# Altium PCB Master-Slave.PcbDoc (part 1 of 2)
Units mil, origin at the board's own origin, x right, y up, seen from the top; angles counter-clockwise.
Board outline 5500 x 5500 mil, 4 copper layers (Top Layer, Ground, Power, Bottom Layer); 264 components, 141 nets, 902 pads, 458 vias.
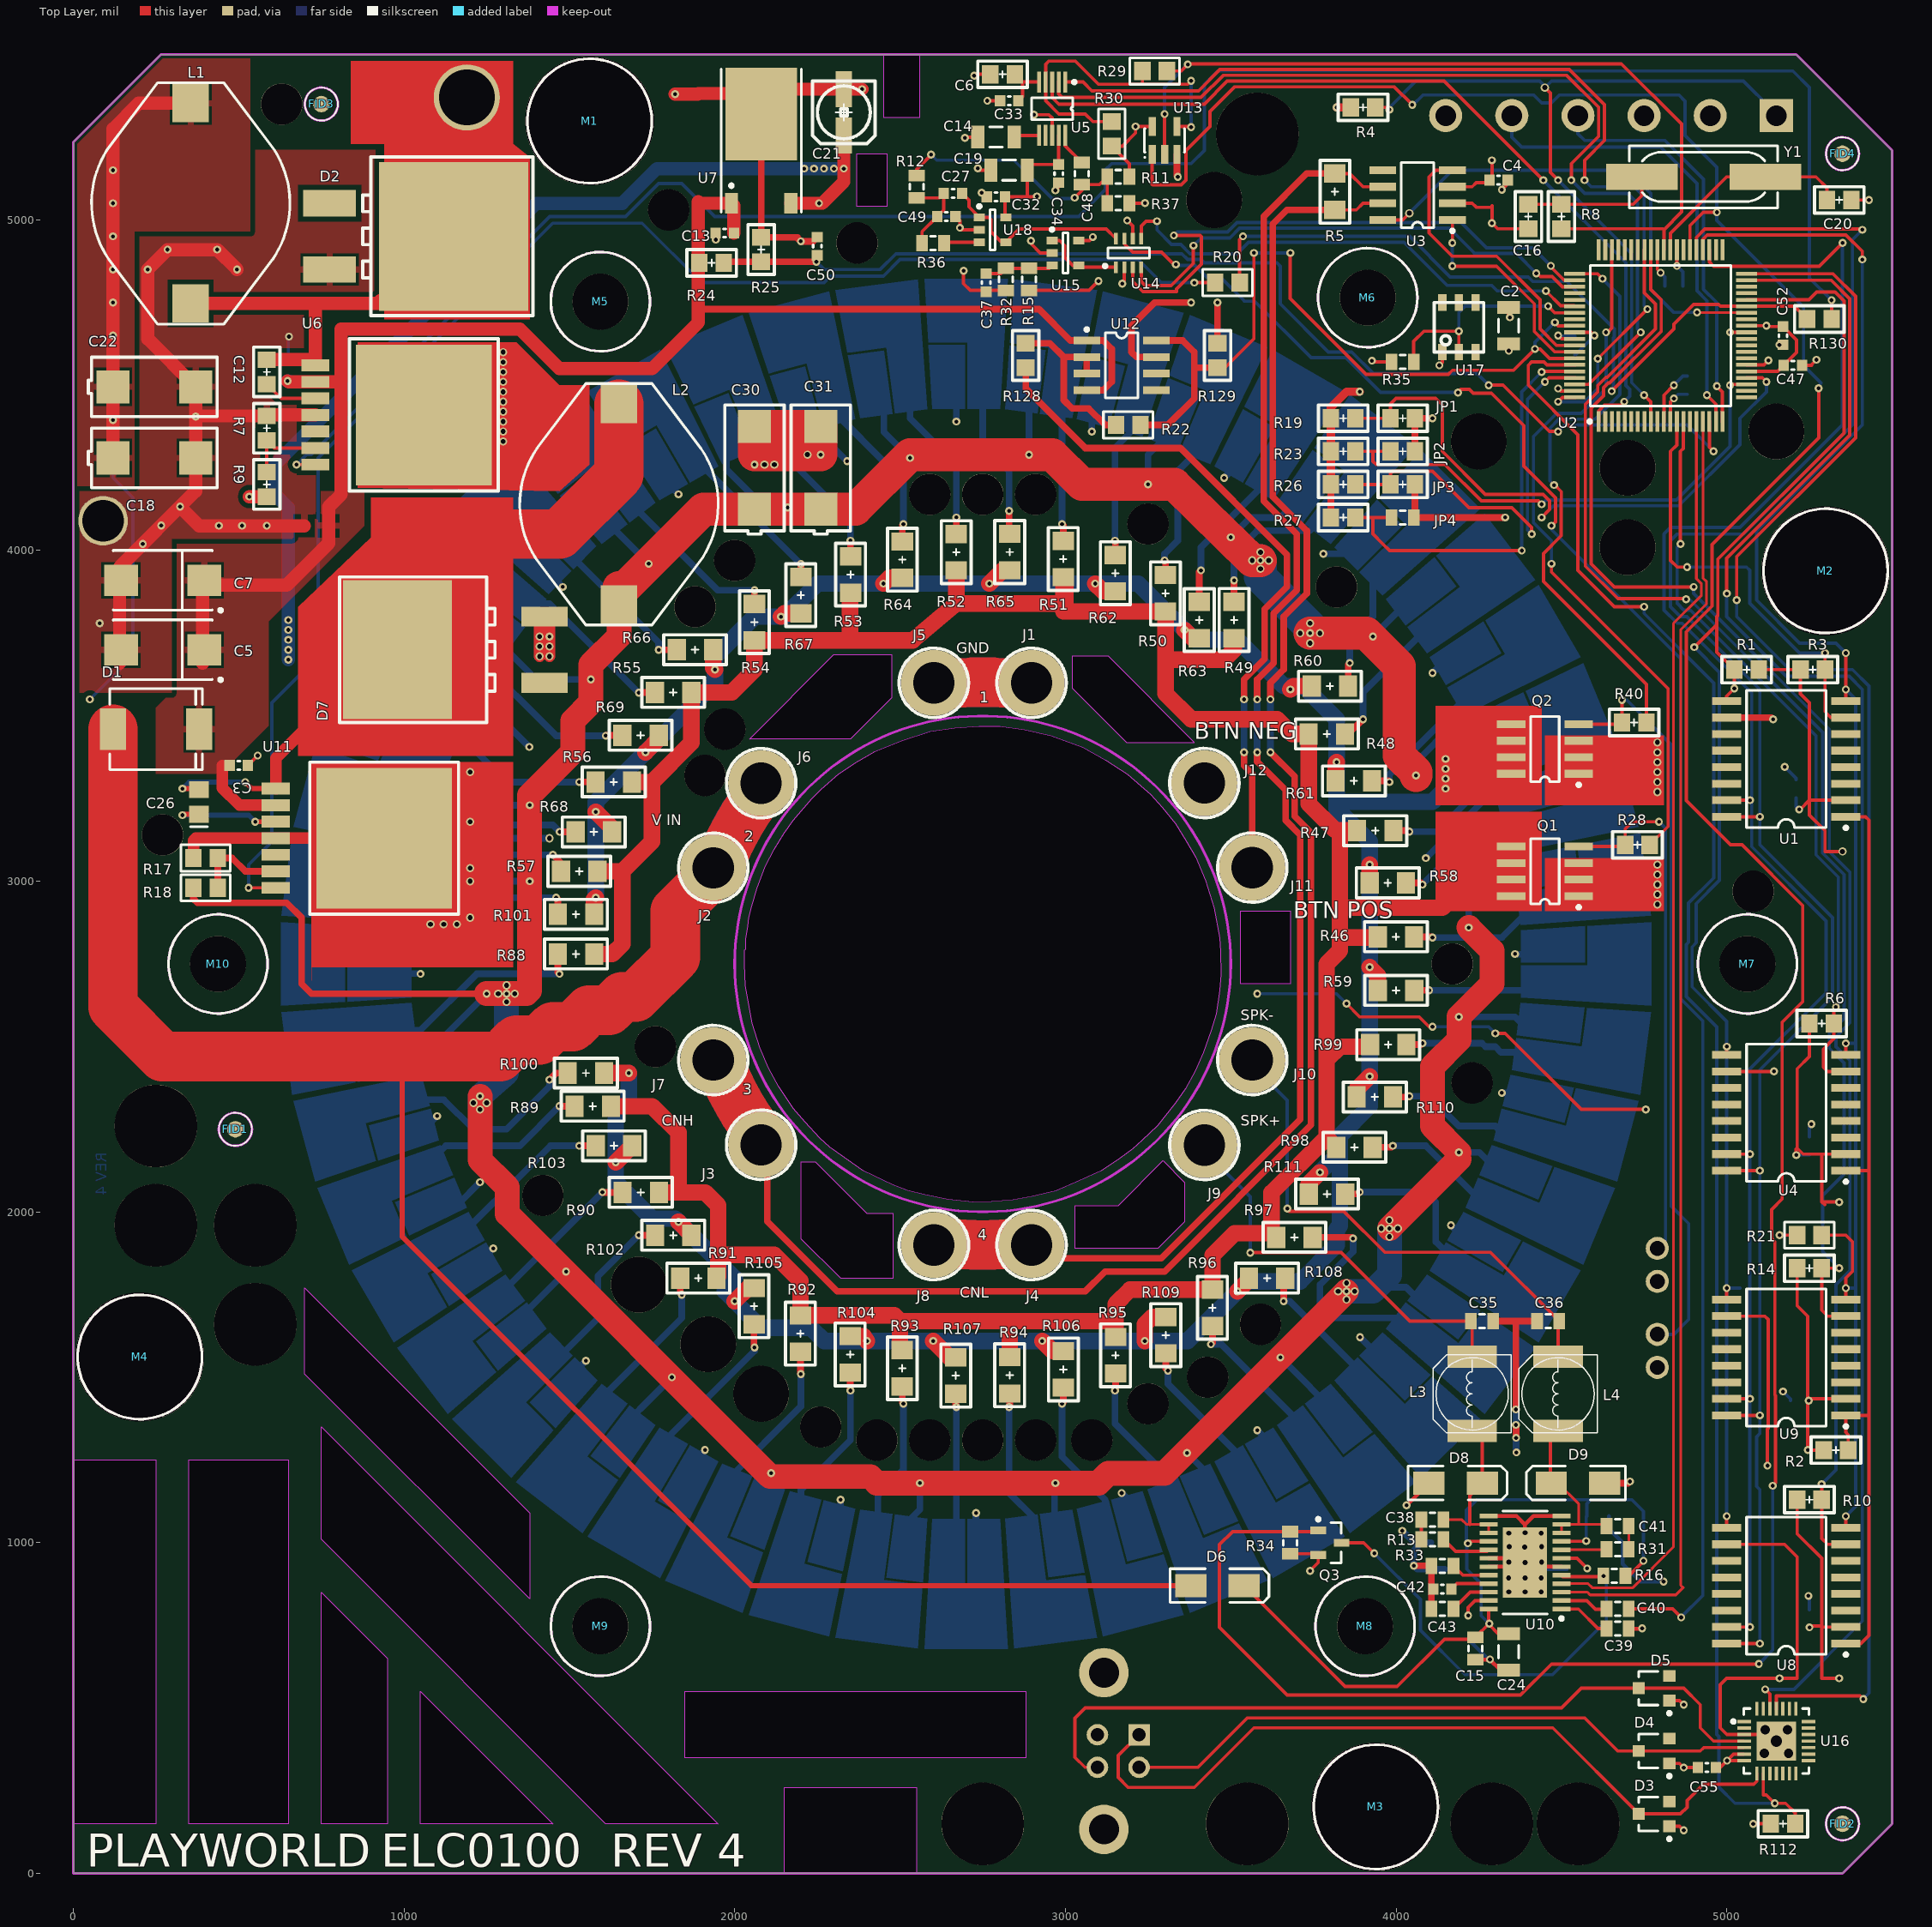
[diagram p0: Top Layer view]
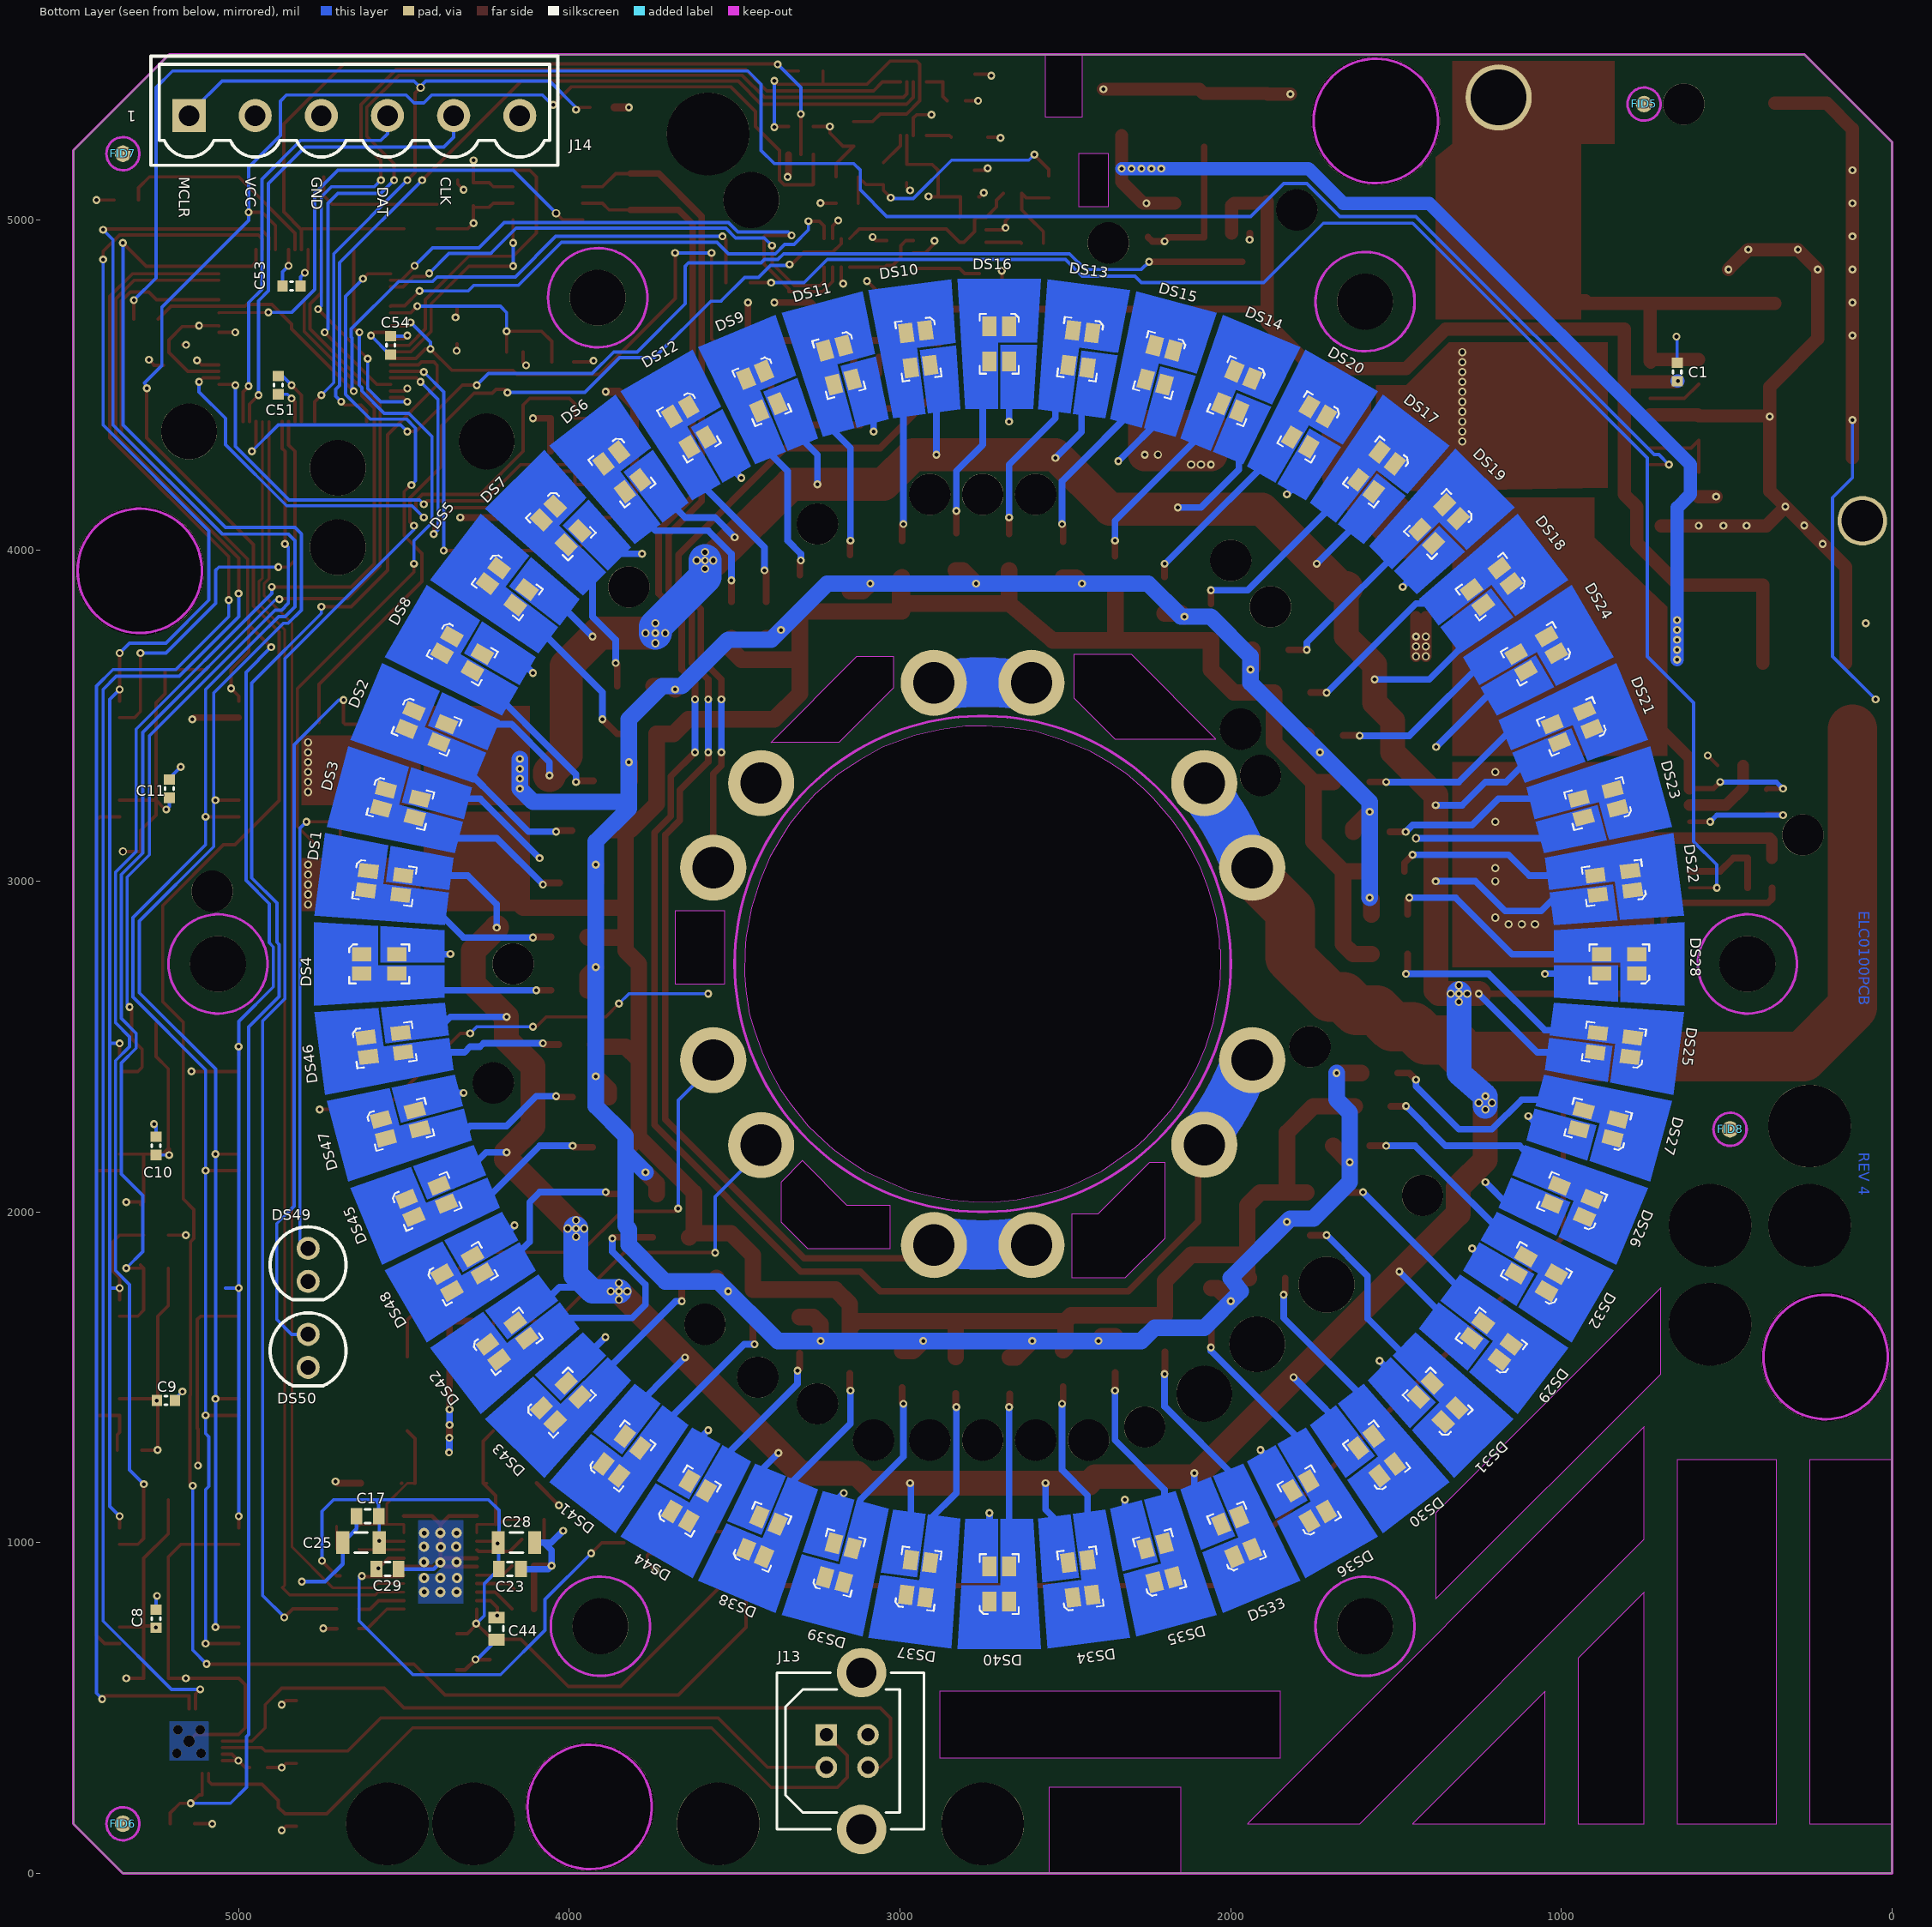
[diagram p1: Bottom Layer view, seen from below]
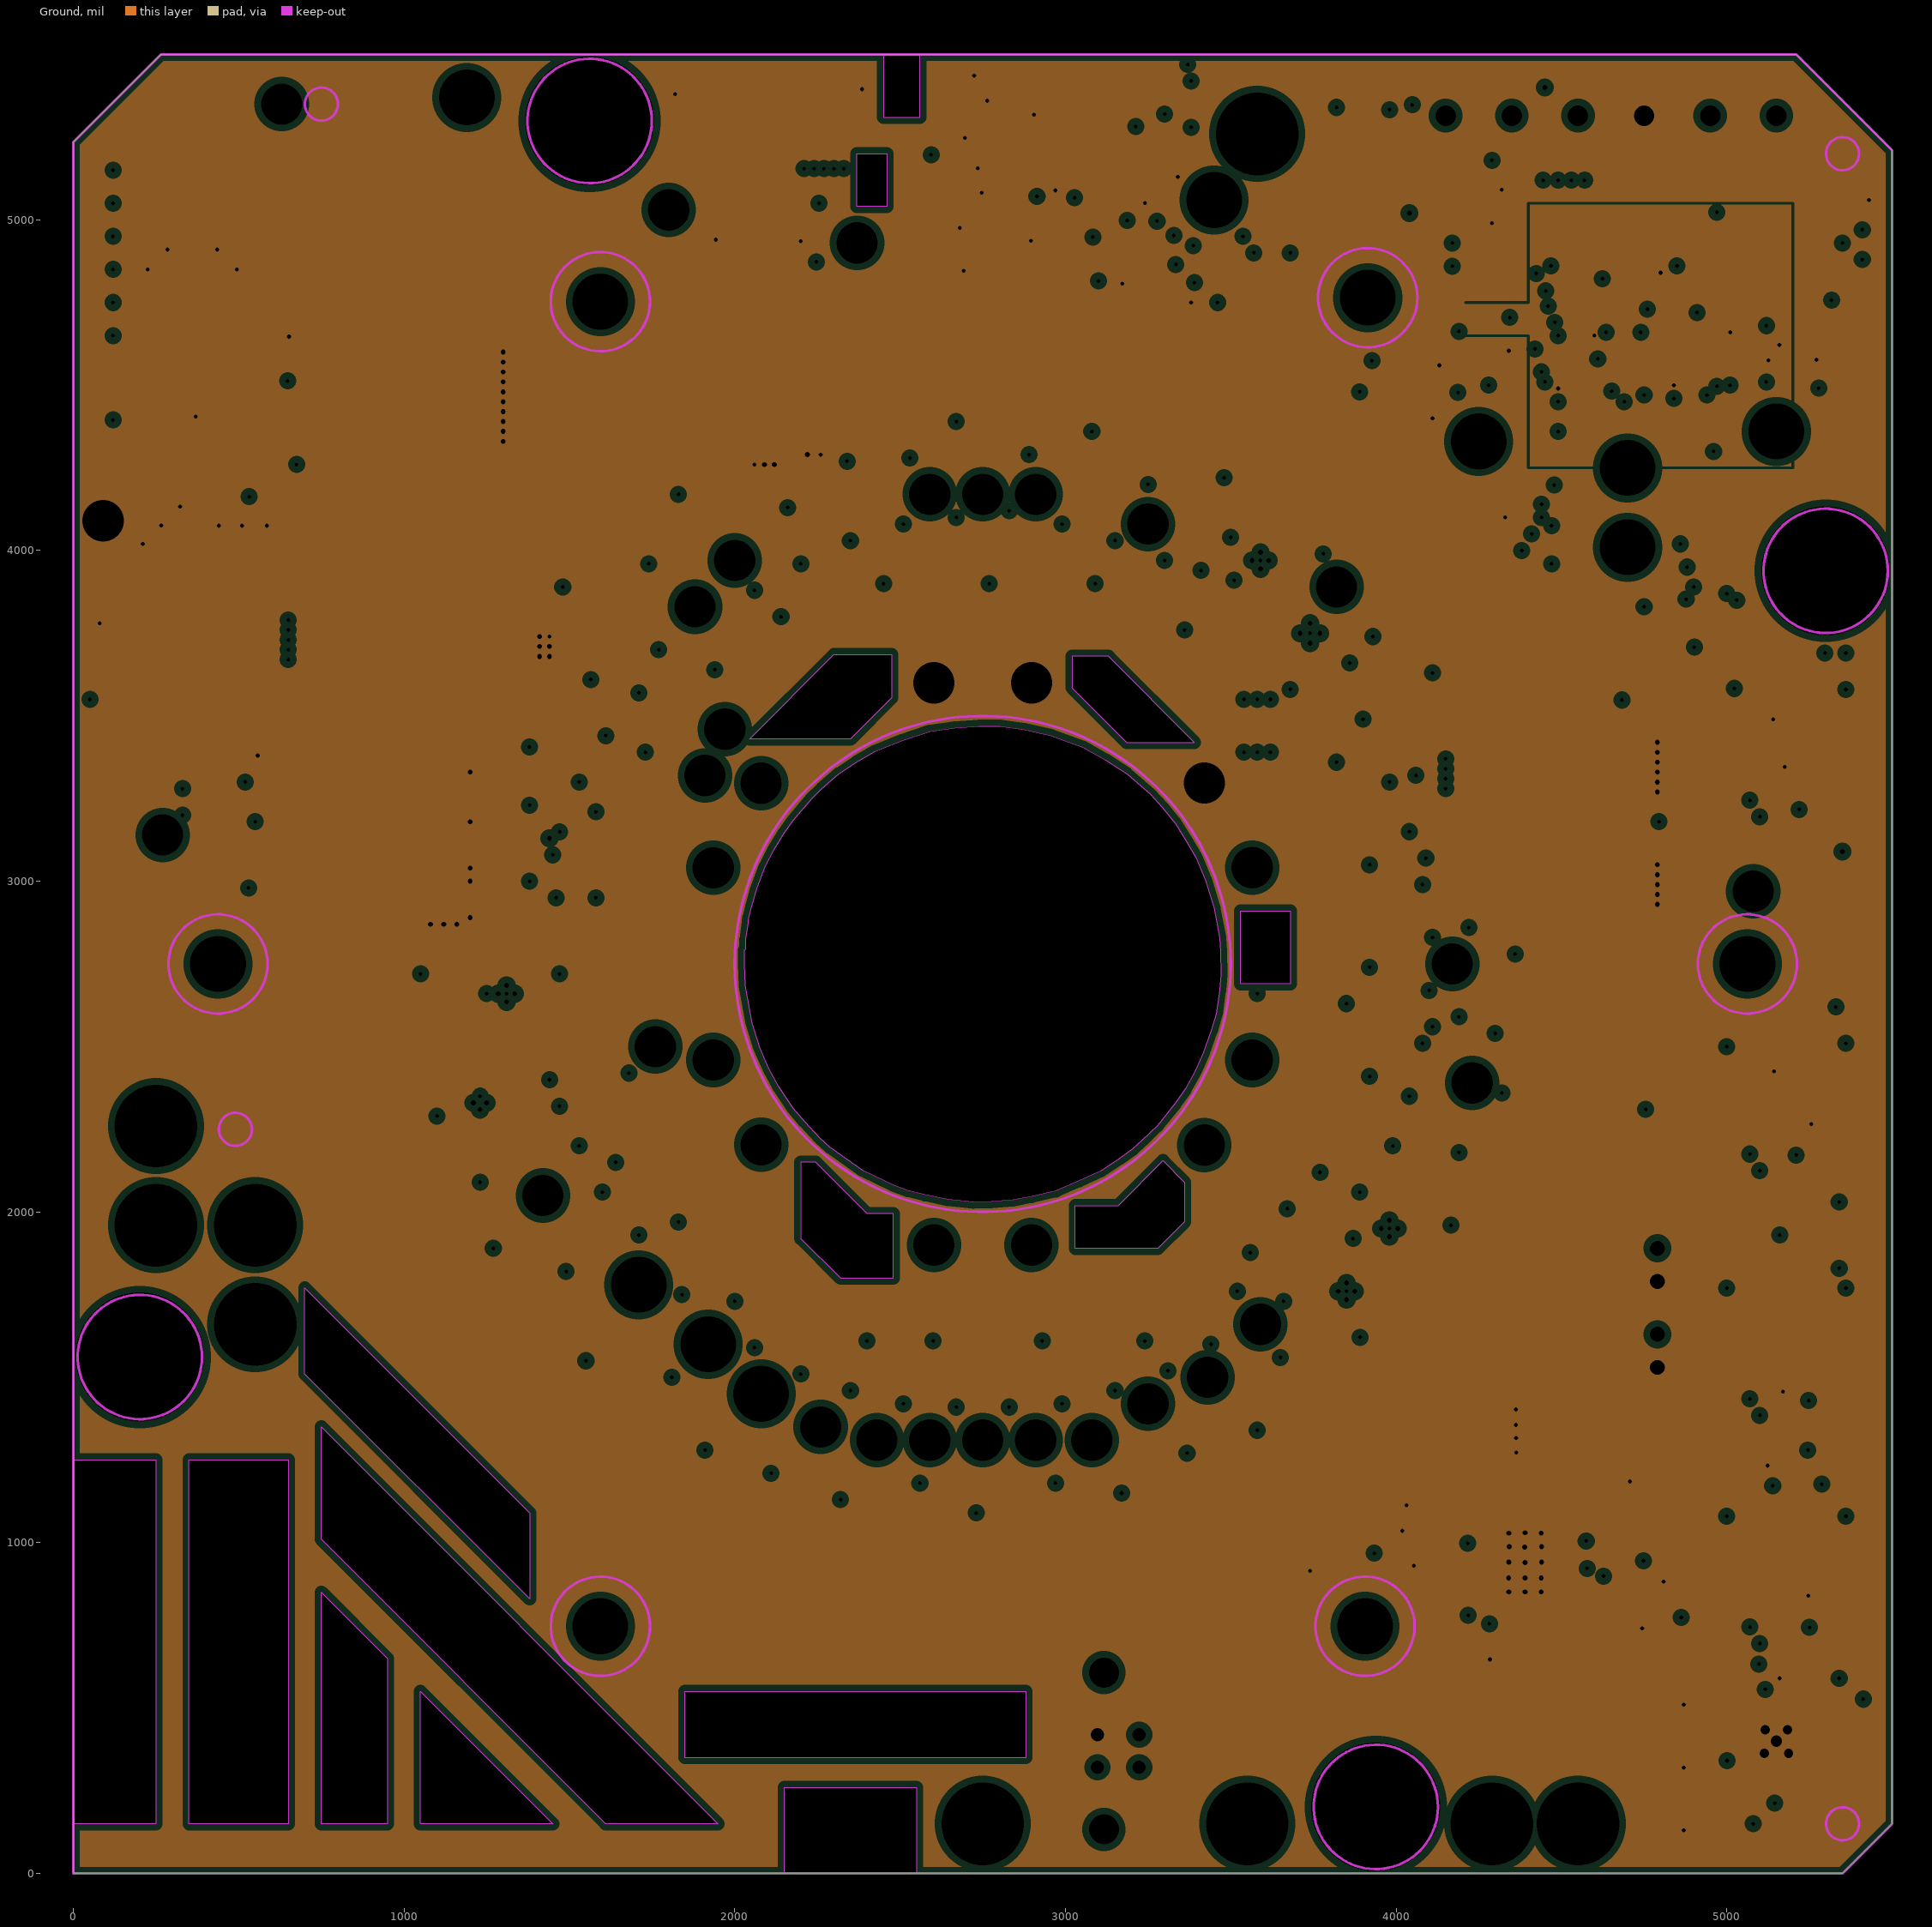
[diagram p2: Ground, clearances drawn from the general rule]
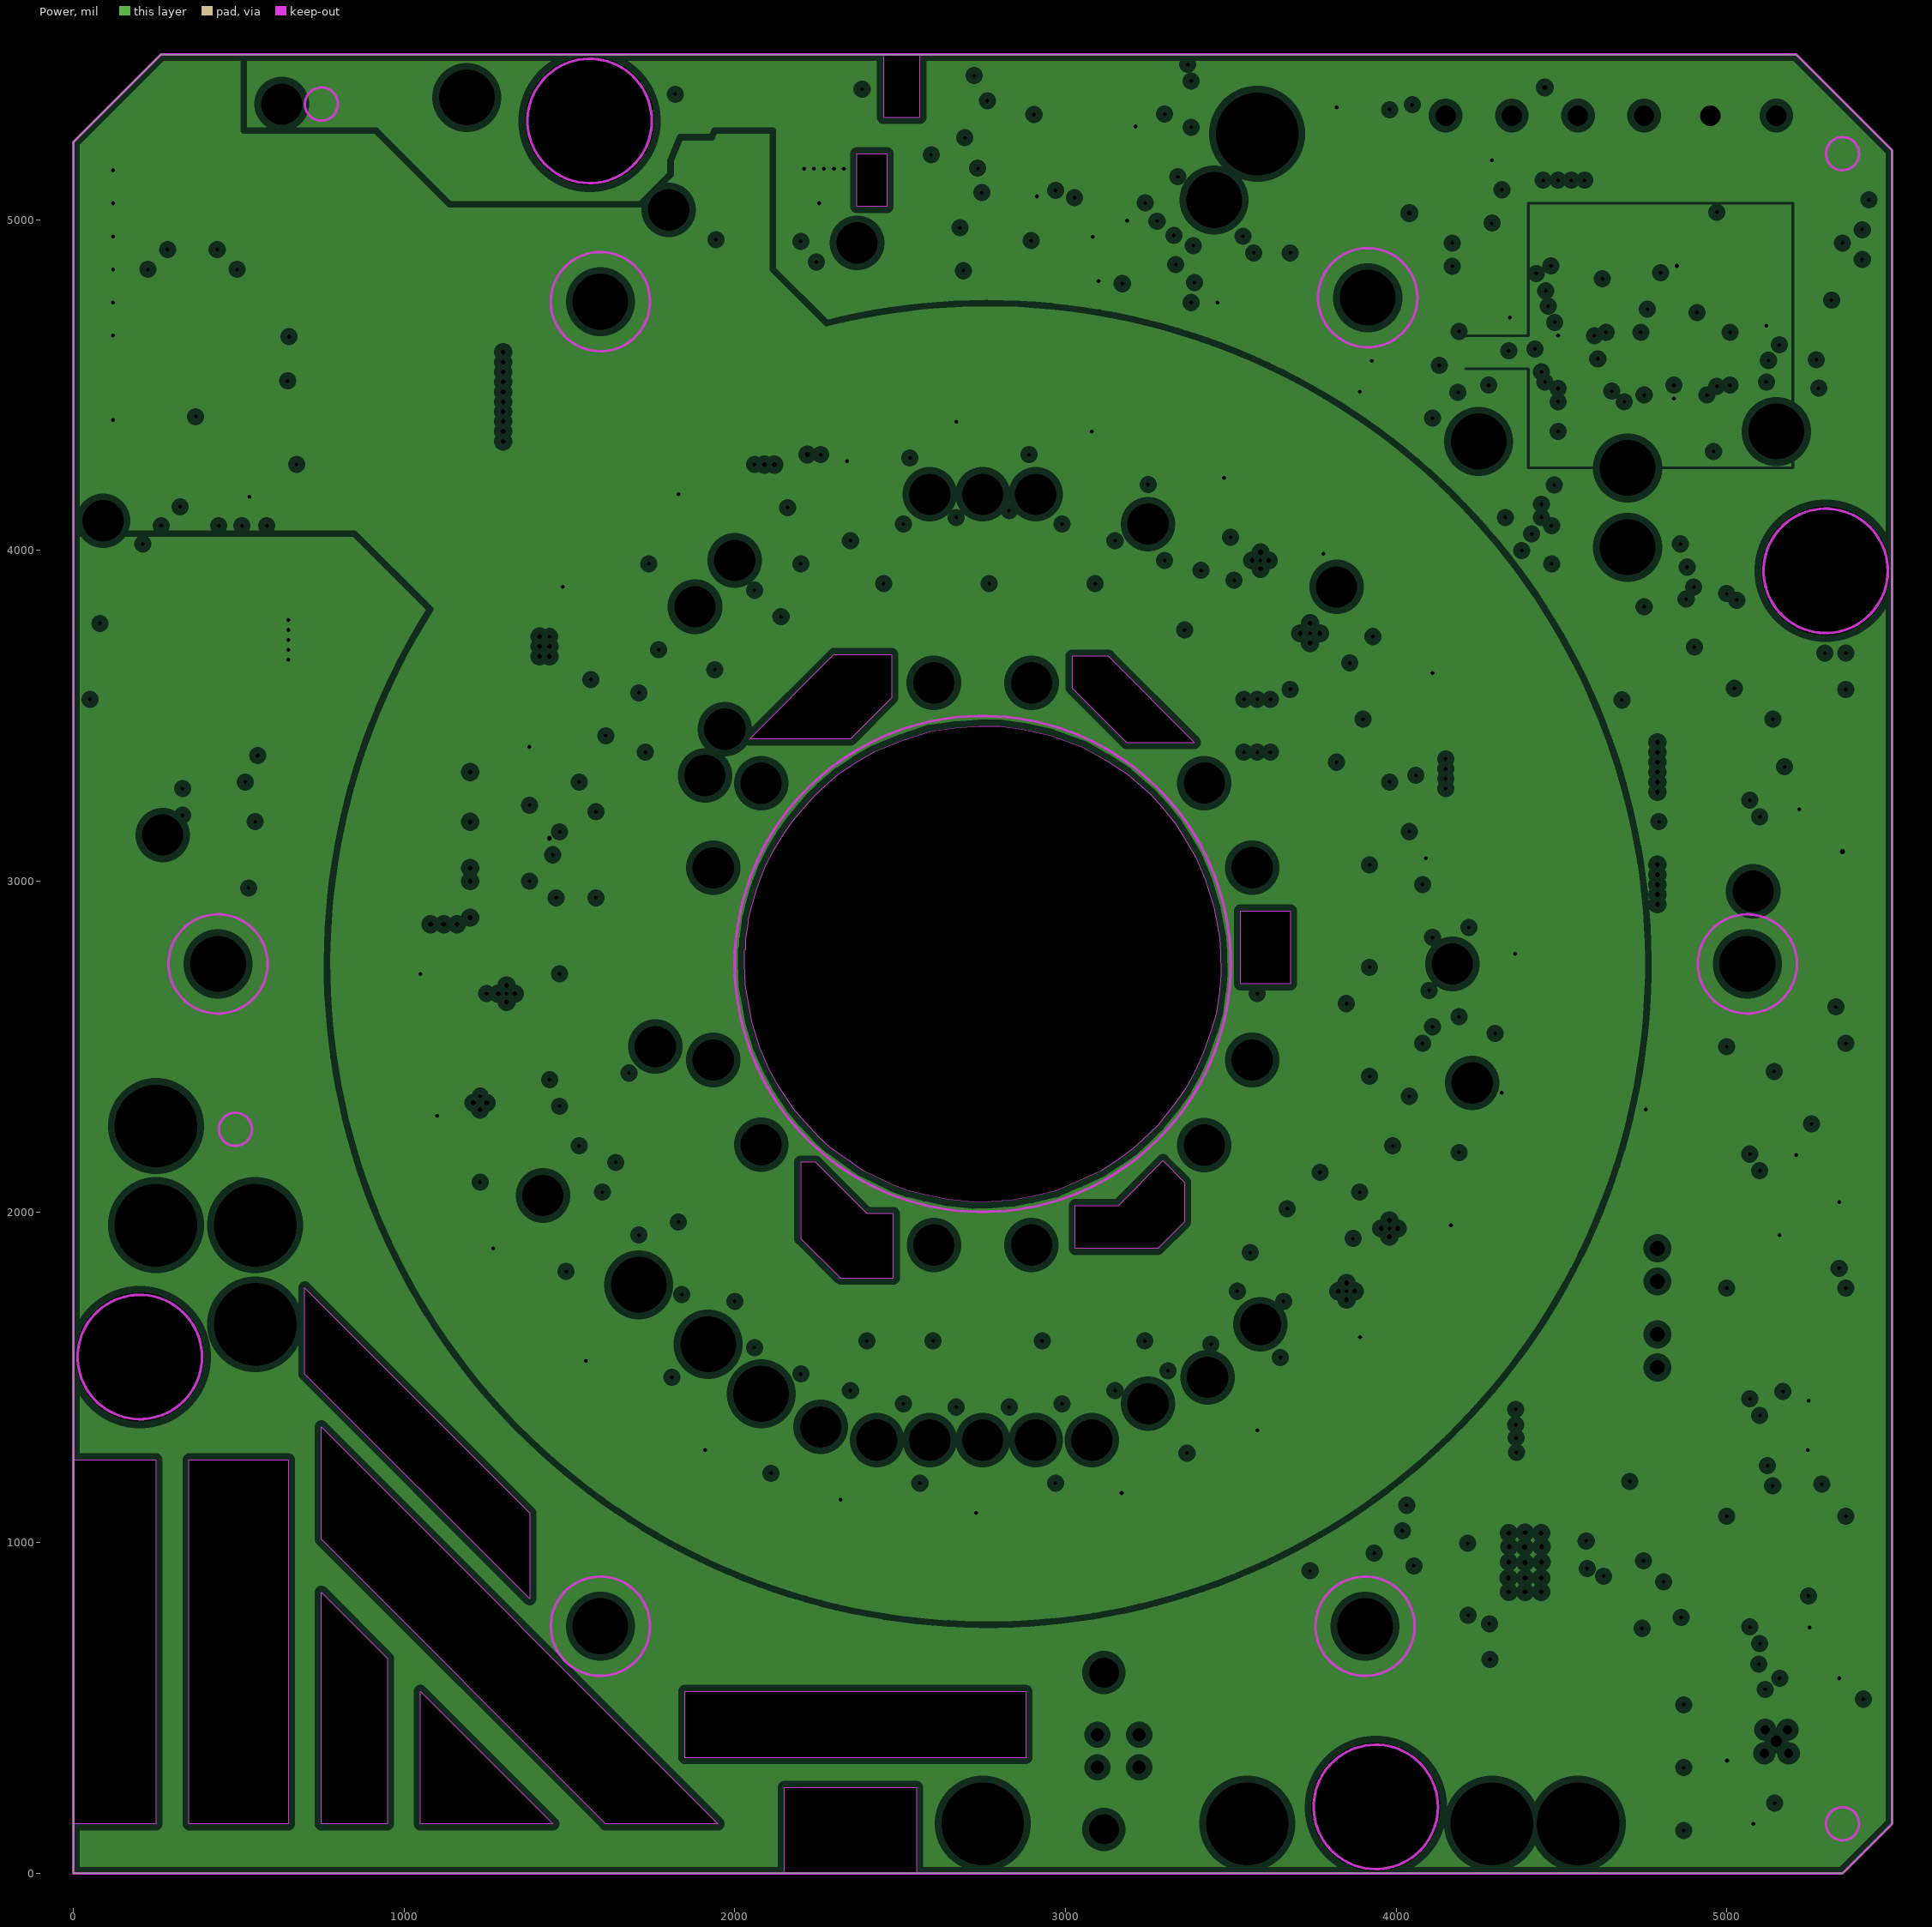
[diagram p3: Power, clearances drawn from the general rule]

## Layer stack, top to bottom
Top Layer: signal copper 1.4
Dielectric: core 12.6, FR-4, Dk 4.8
Ground: plane copper 1.4, net GND
Dielectric: prepreg 12.6, FR-4, Dk 4.8
Power: plane copper 1.4, net (Multiple Nets)
Dielectric: core 12.6, FR-4, Dk 4.8
Bottom Layer: signal copper 1.4

## Board outline
0,0 5350,0 5500,150 5500,5210 5210,5500 265,5500 0,5235
cut-out: 2030,2750 2030,2792 2033,2795 2034,2824 2040,2865 2043,2890 2052,2924 2067,2978 2092,3044 2120,3098 2149,3145 2178,3185 2233,3250 2262,3279 2315,3325 2368,3360 2424,3393 2504,3425 2591,3454 2665,3464 2739,3469 2803,3469 2876,3459 2957,3441 3053,3406 3121,3367 3187,3324 3257,3263 3293,3224 3333,3174 3364,3124 3394,3074 3424,3002 3449,2919 3467,2828 3469,2788 3470,2718 3466,2670 3456,2599 3441,2548 3417,2482 3393,2426 3363,2372 3333,2329 3278,2261 3232,2216 3203,2190 3164,2162 3108,2125 3043,2095 2971,2064 2899,2047 2842,2036 2777,2031 2721,2030 2645,2037 2575,2052 2523,2065 2478,2082 2389,2125 2288,2196 2258,2223 2212,2272 2178,2312 2134,2378 2103,2436 2076,2497 2053,2570 2032,2684
cut-out: 1380,830 700,1510 700,1770 1380,1090
cut-out: 2450,5500 2450,5310 2560,5310 2560,5500
cut-out: 2370,5200 2460,5200 2460,5040 2370,5040
cut-out: 2300,3685 2475,3685 2475,3555 2350,3430 2045,3430
cut-out: 3020,3680 3020,3585 3185,3420 3390,3420 3130,3680
cut-out: 3530,2910 3680,2910 3680,2690 3530,2690
cut-out: 3030,1890 3030,2020 3160,2020 3295,2155 3360,2090 3360,1970 3280,1890
cut-out: 2200,2150 2200,1920 2320,1800 2480,1800 2480,1995 2400,1995 2245,2150
cut-out: 2150,260 2550,260 2550,0 2150,0
cut-out: 1850,350 1850,550 2880,550 2880,350
cut-out: 1950,150 1610,150 750,1010 750,1350
cut-out: 1050,550 1450,150 1050,150
cut-out: 750,850 950,650 950,150 750,150
cut-out: 0,1250 250,1250 250,150 0,150
cut-out: 350,150 350,1250 650,1250 650,150

## Design rules (kind name [scope] priority, off if disabled: settings)
Clearance Clearance_Poly_Gnd [(InPolygon AND InNet('GND')) vs Not InNet('GND')] p1: gap=15
Clearance Clearance_MicroPads [(HasFootprint('TQFP-80')) Or (HasFootprint('TSSOP\10')) Or (HasFootprint('QFN28'))] p2: gap=5
Clearance [All] p3: gap=7.5
ComponentClearance ComponentClearance_LEDs [(HasFootprint('LED T1-3/4 FLUSH')) vs (HasFootprint('LED T1-3/4 FLUSH'))] p1: gap=0 collisioncheckmode=3 verticalgap=0 showdistances=FALSE
ComponentClearance [All] p2: gap=0 collisioncheckmode=3 verticalgap=10 showdistances=FALSE
HoleSize HoleSize_NoNet [HasFootprint('MHole#8') or HasFootprint('MHole250') or (IsPad and InNet('NoNet'))] p1: absolutevalues=TRUE maxlimit=1500 minlimit=1 maxpercent=80.000 minpercent=20.000
HoleSize [All] p2: absolutevalues=TRUE maxlimit=250 minlimit=0 maxpercent=80.000 minpercent=20.000
PlaneClearance [All] p1: clearance=20
PlaneConnect PlaneConnect_1 [All] p1: planeconnectstyle=Direct reliefexpansion=20 reliefentries=4 reliefconductorwidth=10 reliefairgap=6
PlaneConnect [All] p2: planeconnectstyle=Direct reliefexpansion=20 reliefentries=4 reliefconductorwidth=10 reliefairgap=6
PolygonConnect PolygonConnect_Via [IsVia] p1: connectstyle=Direct reliefconductorwidth=10 reliefentries=4 polygonreliefangle="90 Angle"
PolygonConnect [All] p2: connectstyle=Direct reliefconductorwidth=20 reliefentries=4 polygonreliefangle="90 Angle"
RoutingVias [All] p1: holewidth=12 width=24 viastyle="Through Hole" minholewidth=12 minwidth=24 maxholewidth=28 maxwidth=50
ShortCircuit ShortCircuit_VDD_VCC [(InNet('VCC')) vs InNet('VDD')] p1: allowed=TRUE
ShortCircuit [All] p2: allowed=FALSE
SolderMaskExpansion [All] p1: expansion=4
TestPointUsage [All] p1: valid=0 allowmultiple=FALSE
Testpoint [All] p1: side=15 testpointundercomponent=TRUE minsize=40 maxsize=100 preferedsize=60 minholesize=0 maxholesize=40 preferedholesize=32 testpointgrid=1 style=1023 order=0123456789
Width Width_Can [(InNet('NetJ3_1') or InNet('NetJ4_1'))] p1: maxlimit=150 minlimit=10 preferedwidth=10
Width Width_Power [InNetClass('Class_Power')] p2: maxlimit=150 minlimit=10 preferedwidth=40
Width [All] p3: maxlimit=200 minlimit=8 preferedwidth=10 toplayer_prefwidth=8 bottomlayer_prefwidth=8 minimp=50.000000 maximp=50.000000 favimp=50.000000
14 further rules are at their usual default settings.

## Components (designator, comment, footprint, x,y, rotation, side; value= is the part's Value field where it differs from the comment)
C1 "CAP CER .1UF 25V 10% X7R 0603" C0603 650,4540 r270 bottom
C2 "CAP CER 10UF 25V X5R 1206" C1206 4340,4680 r90 top
C3 "CAP CER .1UF 25V 10% X7R 0603" C0603 500,3350 r180 top
C4 "CAP CER .1UF 25V 10% X7R 0603" C0603 4310,5120 r180 top
C5 "47uF 35V" "C EIA7343-43 (X)" 270,3700 r180 top
C6 ".1uF 50V" C0805#1 2810,5440 r180 top
C7 "47uF 35V" "C EIA7343-43 (X)" 270,3910 r180 top
C8 "CAP CER .1UF 25V 10% X7R 0603" C0603 5250,770 r90 bottom
C9 "CAP CER .1UF 25V 10% X7R 0603" C0603 5220,1430 r180 bottom
C10 "CAP CER .1UF 25V 10% X7R 0603" C0603 5250,2200 r270 bottom
C11 "CAP CER .1UF 25V 10% X7R 0603" C0603 5210,3280 r270 bottom
C12 ".01uF 50V" C0805#1 585,4540 r90 top
C13 "CAP CER .1UF 25V 10% X7R 0603" C0603 1970,4960 r180 top
C14 "CAP CER 10UF 25V X5R 1206" C1206 2790,5250 r0 top
C15 "CAP CER 1.0UF 16V 20% X7R 08055" C0805#2 4240,680 r90 top
C16 "18pF" C0805#1 4400,5010 r270 top
C17 "CAP CER 1.0UF 16V 20% X7R 08055" C0805#2 4610,1080 r180 bottom
C18 "68uF 16V" C7343 245,4280 r0 top
C19 "CAP CER 10UF 25V X5R 1206" C1206 2830,5150 r0 top
C20 "18pF" C0805#1 5340,5060 r0 top
C21 "10uF 16V" C4X5.8 2330,5325 r180 top
C22 "68uF 16V" C7343 245,4495 r0 top
C23 "CAP CER 1.0UF 16V 20% X7R 08055" C0805#2 4180,920 r0 bottom
C24 "CAP CER 10UF 25V X5R 1206" C1206 4340,670 r90 top
C25 "CAP CER 10UF 25V X5R 1206" C1206 4630,1000 r180 bottom
C26 ".01uF 50V" C0805#3 380,3240 r90 top
C27 "CAP CER .1UF 25V 10% X7R 0603" C0603 2660,5080 r180 top
C28 "CAP CER 10UF 25V X5R 1206" C1206 4160,1000 r0 bottom
C29 "CAP CER 1.0UF 16V 20% X7R 08055" C0805#2 4550,920 r180 bottom
C30 "68uF 16V" C7343 2060,4250 r90 top
C31 "68uF 16V" C7343 2260,4250 r90 top
C32 "CAP CER .1UF 25V 10% X7R 0603" C0603 2790,5070 r0 top
C33 "CAP CER .1UF 25V 10% X7R 0603" C0603 2830,5360 r180 top
C34 "CAP CER .1UF 25V 10% X7R 0603" C0603 2980,5140 r270 top
C35 "CAP .22UF 25V CERAMIC X7R 0805" C0805#2 4260,1670 r0 top
C36 "CAP .22UF 25V CERAMIC X7R 0805" C0805#2 4460,1670 r0 top
C37 "CAP CER .1UF 25V 10% X7R 0603" C0603 2760,4810 r90 top
C38 "CAP .22UF 25V CERAMIC X7R 0805" C0805#2 4110,1070 r0 top
C39 "CAP CER 1.0UF 16V 20% X7R 08055" C0805#2 4670,740 r0 top
C40 "CAP CER 1.0UF 16V 20% X7R 08055" C0805#2 4670,800 r0 top
C41 "CAP .22UF 25V CERAMIC X7R 0805" C0805#2 4670,1050 r180 top
C42 "CAP CER 220PF 50V 5% C0G 0603" C0603 4140,860 r180 top
C43 "CAP CER 1.0UF 16V 20% X7R 08055" C0805#2 4140,800 r0 top
C44 "CAP CER 1.0UF 16V 20% X7R 08055" C0805#2 4220,740 r90 bottom
C47 "CAP CER .1UF 25V 10% X7R 0603" C0603 5200,4560 r180 top
C48 "CAP CER 1.0UF 16V 20% X7R 08055" C0805#2 3050,5140 r90 top
C49 "CAP CER .1UF 25V 10% X7R 0603" C0603 2640,5010 r0 top
C50 "CAP CER .1UF 25V 10% X7R 0603" C0603 2250,4920 r270 top
C51 "CAP CER .1UF 25V 10% X7R 0603" C0603 4880,4500 r270 bottom
C52 "CAP CER .1UF 25V 10% X7R 0603" C0603 5170,4650 r90 top
C53 "CAP CER .1UF 25V 10% X7R 0603" C0603 4840,4800 r0 bottom
C54 "CAP CER .1UF 25V 10% X7R 0603" C0603 4540.16,4620.47 r90 bottom
C55 "CAP CER .1UF 25V 10% X7R 0603" C0603 4940,320 r0 top
D1 "DIODE ULTRA FAST 3A 600V SMC" DIODE_SMC 250,3460 r0 top
D2 "8A 80V" D2PAK#1 1150,4950 r270 top
D3 "BAS16" SOT23 4780,180 r90 top
D4 "BAS16" SOT23 4780,370 r90 top
D5 "BAS16" SOT23 4780,560 r90 top
D6 "DIODE SCHOTTKY 3A 50V SMA" SMA 3460,870 r0 top
D7 "8A 80V" D2PAK#2 980,3700 r90 top
D8 "DIODE ULTRA FAST 2A 100V SMA" SMA 4180,1180 r0 top
D9 "DIODE ULTRA FAST 2A 100V SMA" SMA 4550,1180 r180 top
DS1 "TLMK3210" L#S/TLMK3210Z 4559,2995 r277.5 bottom locked
DS2 "TLMK3210" L#S/TLMK3210Z 4432,3468 r292.5 bottom locked
DS3 "LM1-PPG1-01-N1" L#S/TLMK3210Z 4511,3235 r285 bottom
DS4 "LM1-PPG1-01-N1" L#S/TLMK3210Z 4575,2750 r270 bottom
DS5 "TLMK3210" L#S/TLMK3210Z 4188,3891 r307.5 bottom locked
DS6 "TLMK3210" L#S/TLMK3210Z 3841,4238 r322.5 bottom locked
DS7 "LM1-PPG1-01-N1" L#S/TLMK3210Z 4026,4076 r315 bottom
DS8 "LM1-PPG1-01-N1" L#S/TLMK3210Z 4324,3688 r300 bottom
DS9 "TLMK3210" L#S/TLMK3210Z 3418,4482 r337.5 bottom locked
DS10 "TLMK3210" L#S/TLMK3210Z 2945,4609 r352.5 bottom locked
DS11 "LM1-PPG1-01-N1" L#S/TLMK3210Z 3185,4561 r345 bottom
DS12 "LM1-PPG1-01-N1" L#S/TLMK3210Z 3638,4374 r330 bottom
DS13 "TLMK3210" L#S/TLMK3210Z 2455,4609 r7.5 bottom locked
DS14 "TLMK3210" L#S/TLMK3210Z 1982,4482 r22.5 bottom locked
DS15 "LM1-PPG1-01-N1" L#S/TLMK3210Z 2215,4561 r15 bottom
DS16 "LM1-PPG1-01-N1" L#S/TLMK3210Z 2700,4625 r0 bottom
DS17 "TLMK3210" L#S/TLMK3210Z 1559,4238 r37.5 bottom locked
DS18 "TLMK3210" L#S/TLMK3210Z 1212,3891 r52.5 bottom locked
DS19 "LM1-PPG1-01-N1" L#S/TLMK3210Z 1370,4080 r45 bottom
DS20 "LM1-PPG1-01-N1" L#S/TLMK3210Z 1763,4374 r30 bottom
DS21 "TLMK3210" L#S/TLMK3210Z 968,3468 r67.5 bottom
DS22 "TLMK3210" L#S/TLMK3210Z 841,2995 r82.5 bottom locked
DS23 "LM1-PPG1-01-N1" L#S/TLMK3210Z 889,3235 r75 bottom
DS24 "LM1-PPG1-01-N1" L#S/TLMK3210Z 1076,3688 r60 bottom
DS25 "TLMK3210" L#S/TLMK3210Z 841,2505 r97.5 bottom locked
DS26 "TLMK3210" L#S/TLMK3210Z 968,2032 r112.5 bottom locked
DS27 "LM1-PPG1-01-N1" L#S/TLMK3210Z 889,2265 r105 bottom
DS28 "LM1-PPG1-01-N1" L#S/TLMK3210Z 825,2750 r90 bottom
DS29 "TLMK3210" L#S/TLMK3210Z 1212,1609 r127.5 bottom locked
DS30 "TLMK3210" L#S/TLMK3210Z 1559,1262 r142.5 bottom locked
DS31 "LM1-PPG1-01-N1" L#S/TLMK3210Z 1374,1424 r135 bottom
DS32 "LM1-PPG1-01-N1" L#S/TLMK3210Z 1076,1813 r120 bottom
DS33 "TLMK3210" L#S/TLMK3210Z 1982,1018 r157.5 bottom locked
DS34 "TLMK3210" L#S/TLMK3210Z 2455,891 r172.5 bottom locked
DS35 "LM1-PPG1-01-N1" L#S/TLMK3210Z 2215,939 r165 bottom
DS36 "LM1-PPG1-01-N1" L#S/TLMK3210Z 1763,1126 r150 bottom
DS37 "TLMK3210" L#S/TLMK3210Z 2945,891 r187.5 bottom locked
DS38 "TLMK3210" L#S/TLMK3210Z 3418,1018 r202.5 bottom locked
DS39 "LM1-PPG1-01-N1" L#S/TLMK3210Z 3185,939 r195 bottom
DS40 "LM1-PPG1-01-N1" L#S/TLMK3210Z 2700,875 r180 bottom
DS41 "TLMK3210" L#S/TLMK3210Z 3841,1262 r217.5 bottom locked
DS42 "TLMK3210" L#S/TLMK3210Z 4188,1609 r232.5 bottom
DS43 "LM1-PPG1-01-N1" L#S/TLMK3210Z 4026,1424 r225 bottom
DS44 "LM1-PPG1-01-N1" L#S/TLMK3210Z 3638,1126 r210 bottom
DS45 "TLMK3210" L#S/TLMK3210Z 4432,2032 r247.5 bottom locked
DS46 "TLMK3210" L#S/TLMK3210Z 4559,2505 r262.5 bottom locked
DS47 "LM1-PPG1-01-N1" L#S/TLMK3210Z 4511,2265 r255 bottom
DS48 "LM1-PPG1-01-N1" L#S/TLMK3210Z 4324,1813 r240 bottom
DS49 "RED LED T1-3/4" "LED T1-3/4 Flush" 4790,1890 r270 bottom
DS50 "GREEN T1-3/4" "LED T1-3/4 Flush" 4790,1630 r270 bottom
FID1 "Fiducial" Fiducial#1 490,2250 r90 top
FID2 "Fiducial" Fiducial#1 5350,150 r90 top locked
FID3 "Fiducial" Fiducial#1 750,5350 r90 top locked
FID4 "Fiducial" Fiducial#1 5350,5200 r90 top
FID5 "Fiducial" Fiducial#2 750,5350 r90 top
FID6 "Fiducial" Fiducial#2 5350,150 r90 top
FID7 "Fiducial" Fiducial#2 5350,5200 r90 top
FID8 "Fiducial" Fiducial#2 490,2250 r90 top
J1 "*" WIRE_125 2897.97,3600 r0 top
J2 "*" WIRE_125 1935,3040.64 r0 top
J3 "*" WIRE_125 2080,2203.06 r0 top
J4 "*" WIRE_125 2897.64,1900 r0 top
J5 "*" WIRE_125 2602.23,3600 r0 top
J6 "*" WIRE_125 2080,3296.64 r0 top
J7 "*" WIRE_125 1935,2459.42 r0 top
J8 "*" WIRE_125 2602.41,1900 r0 top
J9 "*" WIRE_125 3420,2202.37 r180 top
J10 "*" WIRE_125 3565,2459.42 r0 top
J11 "*" WIRE_125 3565,3041.32 r0 top
J12 "*" WIRE_125 3420,3296.86 r270 top
J13 "KUSBVX-BS1N-B" KUSBVX-BS1N 3150,370 r90 bottom locked
J14 "Phoenix Contact 1755778" JCPM5086VE0Z 5150,5315 r180 bottom locked
JP1 "0 Ohm Config" R0805#1 4020,4400 r0 top
JP2 "0 Ohm Config" R0805#1 4020,4300 r0 top
JP3 "0 Ohm Config" R0805#1 4020,4200 r0 top
JP4 "0 Ohm Config" 0805 4020,4100 r0 top
L1 "33uH 3A" IND/DO5022 355,5050 r90 top
L2 "33uH 3A" IND/DO5022 1650,4140 r270 top
L3 "COIL 22UH 900MA CHOKE SMD" PANASONIC_ELL 4230,1450 r90 top
L4 "COIL 22UH 900MA CHOKE SMD" PANASONIC_ELL 4490,1450 r90 top
M1 "Mounting Hole 1/4\" Screw" MHole250 1561.39,5298.99 r0 top locked
M2 "Mounting Hole 1/4\" Screw" MHole250 5298.99,3938.61 r0 top locked
M3 "Mounting Hole 1/4\" Screw" MHole250 3938.61,201.01 r0 top locked
M4 "Mounting Hole 1/4\" Screw" MHole250 201.01,1561.39 r0 top locked
M5 "Mounting Hole #8 Screw" MHole#8 1593.7,4752.7 r0 top
M6 "Mounting Hole #8 Screw" MHole#8 3914.3,4764.7 r0 top
M7 "Mounting Hole #8 Screw" MHole#8 5062.5,2750 r0 top
M8 "Mounting Hole #8 Screw" MHole#8 3906.2,747.3 r0 top
M9 "Mounting Hole #8 Screw" MHole#8 1593.8,747.3 r0 top
M10 "Mounting Hole #8 Screw" MHole#8 437.5,2750 r0 top
Q1 "FDS8884" SO8 4450,3030 r90 top
Q2 "FDS8884" SO8 4450,3400 r90 top
Q3 "FDV301" SOT95P245X145-3L 3800,1000 r0 top
R1 "100K 1%" R0805#1 5060,3640 r180 top
R2 "100K 1%" R0805#1 5330,1280 r0 top locked
R3 "100K 1%" R0805#1 5260,3640 r180 top
R4 "10.0k 1%" R0805#1 3900,5340 r180 top
R5 "121 1%" R1206 3815,5085 r270 top
R6 "100K 1%" R0805#1 5287,2570 r180 top
R7 "1.0k 1%" R0805#1 585,4370 r270 top
R8 "0" R0805#1 4500,5010 r90 top
R9 "3.16K 1%" R0805#1 585,4200 r270 top
R10 "100K 1%" R0805#1 5250,1130 r180 top locked
R11 "100K 1%" R0805#2 3160,5130 r180 top
R12 "400" R0805#2 2550,5100 r270 top
R13 "RES 51.0 OHM 1/8W 1% 0805 SMD" R0805#2 4110,1010 r0 top
R14 "100K 1%" R0805#1 5250,1830 r180 top locked
R15 "10.0k 1%" R0805#2 2890,4820 r270 top
R16 "100K 1%" R0805#2 4660,900 r0 top
R17 "1.0k 1%" R0805#1 400,3070 r0 top
R18 "1.65K 1%" R0805#1 400,2980 r180 top
R19 "100K 1%" R0805#1 3840,4400 r180 top
R20 "10.0k 1%" R0805#1 3490,4810 r180 top
R21 "100K 1%" R0805#1 5250,1930 r180 top
R22 "0" R0805#1 3190,4380 r0 top
R23 "100K 1%" R0805#1 3840,4300 r180 top
R24 "7.50k 1%" R0805#1 1930,4870 r180 top
R25 "2.49k 1%" R0805#1 2080,4910 r270 top
R26 "100K 1%" R0805#1 3840,4200 r180 top
R27 "100K 1%" R0805#1 3840,4100 r180 top
R28 "10.0k 1%" R0805#1 4730,3110 r180 top
R29 "0" R0805#1 3270,5450 r180 top
R30 "100K 1%" R0805#1 3140,5260 r270 top
R31 "RES 51.0 OHM 1/8W 1% 0805 SMD" R0805#2 4670,980 r180 top
R32 "10.0k 1%" R0805#2 2820,4820 r90 top
R33 "RES 120K OHM 1/8W 5% 0805 SMD" R0805#2 4140,930 r0 top
R34 "100K 1%" R0805#2 3680,1000 r90 top
R35 "4.7k" R0805#2 4020,4570 r0 top
R36 "400" R0805#2 2600,4930 r0 top
R37 "100K 1%" R0805#2 3160,5050 r180 top
R40 "10.0k 1%" R0805#1 4720,3480 r180 top
R46 "15.0 OHM 1%" R1206 3999.68,2831.91 r0 top
R47 "15.0 OHM 1%" R1206 3937.13,3152.98 r0 top
R48 "15.0 OHM 1%" R1206 3790.71,3445.38 r0 top
R49 "15.0 OHM 1%" R1206 3510,3790 r90 top
R50 "15.0 OHM 1%" R1206 3302.66,3870.69 r90 top
R51 "15.0 OHM 1%" R1206 2993.53,3974.3 r90 top
R52 "15.0 OHM 1%" R1206 2670,3995 r90 top
R53 "15.0 OHM 1%" R1206 2350.35,3927.34 r90 top
R54 "15.0 OHM 1%" R1206 2059.51,3783.38 r90 top
R55 "15.0 OHM 1%" R1206 1813.81,3571.02 r180 top
R56 "15.0 OHM 1%" R1206 1634.17,3300.27 r180 top
R57 "15.0 OHM 1%" R1206 1530,3030 r180 top
R58 "32.4 OHM 1%" R1206 3975,2995 r0 top
R59 "32.4 OHM 1%" R1206 4000,2670 r0 top
R60 "32.4 OHM 1%" R1206 3800,3590 r0 top
R61 "32.4 OHM 1%" R1206 3872.42,3303.52 r0 top
R62 "32.4 OHM 1%" R1206 3151.06,3931.48 r90 top
R63 "32.4 OHM 1%" R1206 3404.82,3789.87 r90 top
R64 "32.4 OHM 1%" R1206 2506.86,3972.36 r90 top
R65 "32.4 OHM 1%" R1206 2831.63,3995.45 r90 top
R66 "32.4 OHM 1%" R1206 1880,3700 r180 top
R67 "32.4 OHM 1%" R1206 2200.06,3865.17 r90 top
R68 "32.4 OHM 1%" R1206 1573.86,3149.24 r180 top
R69 "32.4 OHM 1%" R1206 1715.39,3441.3 r180 top
R88 "15.0 OHM 1%" R1206 1520,2780 r180 top
R89 "15.0 OHM 1%" R1206 1570.55,2319.63 r180 top
R90 "15.0 OHM 1%" R1206 1716.02,2059.12 r180 top
R91 "15.0 OHM 1%" R1206 1890,1800 r180 top
R92 "15.0 OHM 1%" R1206 2198.71,1632.1 r270 top
R93 "15.0 OHM 1%" R1206 2506.78,1527.25 r270 top
R94 "15.0 OHM 1%" R1206 2831.53,1506.1 r270 top
R95 "15.0 OHM 1%" R1206 3151.68,1566.7 r270 top
R96 "15.0 OHM 1%" R1206 3444.76,1710.22 r270 top
R97 "15.0 OHM 1%" R1206 3692.65,1923.32 r0 top
R98 "15.0 OHM 1%" R1206 3874.23,2195.59 r0 top
R99 "15.0 OHM 1%" R1206 3976.39,2506.06 r0 top
R100 "32.4 OHM 1%" R1206 1550,2420 r180 top
R101 "32.4 OHM 1%" R1206 1520,2900 r180 top
R102 "32.4 OHM 1%" R1206 1814.22,1929.34 r180 top
R103 "32.4 OHM 1%" R1206 1634.99,2200.14 r180 top
R104 "32.4 OHM 1%" R1206 2349.19,1569.26 r270 top
R105 "32.4 OHM 1%" R1206 2058.45,1715.02 r270 top
R106 "32.4 OHM 1%" R1206 2993.89,1523.9 r270 top
R107 "32.4 OHM 1%" R1206 2668.41,1505.16 r270 top
R108 "32.4 OHM 1%" R1206 3610,1800 r0 top
R109 "32.4 OHM 1%" R1206 3303.58,1627.46 r270 top
R110 "32.4 OHM 1%" R1206 3935.61,2347.54 r0 top
R111 "32.4 OHM 1%" R1206 3791.27,2054.25 r0 top
R112 "10.0k 1%" R0805#1 5170,150 r180 top locked
R128 "3.16K 1%" R0805#1 2880,4590 r90 top
R129 "20.0k 1%" R0805#1 3460,4590 r90 top
R130 "10.0k 1%" R0805#1 5280,4700 r0 top
U1 "M25P64-VMF6G" so16w 5180,3370 r90 top locked
U2 "dsPIC30F5013-20I/PT" TQFP-80 4800,4650 r90 top locked
U3 "SN65HVD230DR" "SOIC 8" 4065,5075 r90 top
U4 "M25P64-VMF6G" so16w 5180,2300 r90 top locked
U5 "CS4344-CZZ" TSSOP\10 2960,5336 r180 top
U6 "LM2676S-ADJ/NOPB" TO263\7 1060,4410 r270 top
U7 "LP2950CDT-3.3" "D-PAK / TO-252AA" 2080,5185 r0 top
U8 "M25P64-VMF6G" so16w 5180,870 r90 top locked
U9 "M25P64-VMF6G" so16w 5180,1560 r90 top locked
U10 "IC AUDIO PWR AMP D MONO 24-TSSOP" HTSSOP-24 4390,940 r180 top
U11 "LM2676S-ADJ/NOPB" TO263\7 940,3130 r270 top
U12 "MOCD207M" "SOIC 8" 3170,4560 r270 top
U13 "SN74AHC1G125DBVR" SOT23-5 3300,5240 r0 top
U14 "IC DIGITAL POT 256-TAP SOT23-8" SOT95P245X110-*L 3190,4900 r90 top
U15 "IC OPAMP 1.8V 0-DRIFT SOT23-5" SOT95P245X145-5L 3000,4900 r0 top
U16 "IC USB-TO-UART BRIDGE 28MLP" QFN-28 5150,400 r0 top
U17 "IC SILICON SERIAL NUMBER 6-TSOC" TSOC6 4140,4600 r90 top
U18 "IC SINGLE SUPPLY OPAMP SOT-23-5" SOT95P245X145-5L 2780,4970 r0 top
Y1 "8.192MHz" XTSL\CSM-7 4930,5130 r180 top

## Footprints (in the part's own frame and the unit in brackets; to place one, negate y for a bottom-side part, rotate by r counter-clockwise, add the part's x,y. Pads: shape width x height; smd on the part's side, far side on the other; paste and mask are expansions set on the pad)
0805 [mm] "0805 Generic"
  rect 0.9x1.25 smd: 1(-0.85,0) 2(0.85,0)
  silkscreen extent -0.2,-0.53 0.2,0.53, body extent -1.02,-0.64 1,0.64, height 0.61
C4X5.8 [mil]
  rect 50x110 smd: 1(0,70) 2(0,-70)
  silkscreen extent -95,-95 95,95
C0603 [mm] "0603 Generic"
  rect 0.8x0.85 smd: 1(-0.7,0) 2(0.7,0)
  silkscreen extent -0.1,-0.33 0.1,0.33, body extent -0.8,-0.42 0.82,0.4, height 0.46
C0805#1 [mil]
  rect 50x55 smd: 1(-37,0) 2(37,0)
  silkscreen extent -75,-40 75,40
C0805#2 [mil] "0805 Generic"
  rect 35.43x49.21 smd: 1(-33.46,0) 2(33.46,0)
  silkscreen extent -8,-21 8,21, body extent -40,-25 40,25, height 24
C0805#3 [mil] "Chip Capacitor; Body 2.0 x 1.2 mm (LxW typ)"
  rect 51.18x59.06 smd: 1(-37.4,0) 2(37.4,0)
  silkscreen extent -75,-26 -75,26
C1206 [mm] "1206 Generic"
  rect 1x1.75 smd: 1(-1.4,0) 2(1.4,0)
  silkscreen extent -0.5,-0.77 0.5,0.77, body extent -1.64,-0.81 1.58,0.81, height 0.61
C7343 [mil]
  rect 100x100 smd: 1(-125,0) 2(125,0)
  silkscreen extent -200,-90 190,90
"C EIA7343-43 (X)" [mm] "Capacitor, SM Tantalum; Body 7.3 x 4.3 mm (LxW typ)"
  rect 2.6x2.4 smd: 1(-3.2,0) 2(3.2,0)
  silkscreen extent -4.58,-2.3 3.8,2.42
D2PAK#1 [mil]
  rect 80x160 smd: 1(-100,-375) 3(100,-375)
  rect 450x450 smd: 2(0,0)
  silkscreen extent -240,-275 240,240
D2PAK#2 [mil]
  rect 60x140 smd: 1(-100,-445) 3(100,-445)
  rect 420x330 smd: 2(0,0)
  silkscreen extent -220,-295 220,175
"D-PAK / TO-252AA" [mm] "D-PAK/TO-252-AA; 3 Leads (1 Cropped); Body 10.4 (inc. leads) x 6.7 mm (LxW max)"
  rect 1x1.6 smd: 1(-2.285,-3.425) 3(2.285,-3.425)
  rect 5.5x7.1 smd: 2(0,3.425)
  silkscreen extent -3.08,-4.13 3.08,6.88
DIODE_SMC [mm] "Diode"
  rect 2x3.2 smd: A(-3.305,0) K(3.305,0)
  silkscreen extent -3.55,-3.11 3.55,3.11
Fiducial#1 [mil]
  round 50 smd mask+20: 1(0,0)
  Keep-Out Layer circle w7.87: c0,0 r50
  silkscreen extent -50,-50 50,50
Fiducial#2 [mil]
  round 50 smd far side mask+20: 1(0,0)
  Keep-Out Layer circle w7.87: c0,0 r50
  silkscreen extent -50,-50 50,50
HTSSOP-24 [mm] "24-Pin Power Pad"
  rect 1.4x0.35 smd: 1(-2.8,3.575) 2(-2.8,2.925) 3(-2.8,2.275) 4(-2.8,1.625) 5(-2.8,0.975) 6(-2.8,0.325) 7(-2.8,-0.325) 8(-2.8,-0.975) 9(-2.8,-1.625) 10(-2.8,-2.275) 11(-2.8,-2.925) 12(-2.8,-3.575) 13(2.8,-3.575) 14(2.8,-2.925) 15(2.8,-2.275) 16(2.8,-1.625) 17(2.8,-0.975) 18(2.8,-0.325) 19(2.8,0.325) 20(2.8,0.975) 21(2.8,1.625) 22(2.8,2.275) 23(2.8,2.925) 24(2.8,3.575)
  rect 3.4x5.4 smd paste-5: PP1(0,0)
  silkscreen extent -2.93,-3.95 1.7,4.42, body extent -2.25,-3.95 2.25,3.95, height 1.2
IND/DO5022 [mil]
  rect 115x110 smd: 1(-302.5,0) 2(302.5,0)
  silkscreen extent -365,-300 365,300
JCPM5086VE0Z [mil] "ASI term strip header 6P 5.08mm Vert"
  rect 100x100 / inner round 100 / far side rect 100x100 hole 62: 1(0,0)
  round 100 hole 62: 2(200,0) 3(400,0) 4(600,0) 5(800,0) 6(1000,0)
  silkscreen extent -115,-150 1115,180
KUSBVX-BS1N [mm] "USB Type B PCB"
  rect 1.651x1.651 hole 1.016: 1(1.25,1.85)
  round 1.651 hole 1.016: 2(-1.25,1.85) 3(-1.25,-1.35) 4(1.25,-1.35)
  round 3.8 hole 2.3: 5(6.02,-0.85) 6(-6.02,-0.85)
  silkscreen extent -6.02,-5.65 6.02,5.65
L#S/TLMK3210Z [mm]
  rect 1.1x1.5 smd mask+0: 1(-0.75,-1.35) 2(-0.75,1.35) 3(0.75,1.35) 4(0.75,-1.35)
  Top Layer region: -2.6,5 -0.1,5 -0.1,0.1 -2.9,0.1 -2.6,5
  Top Layer region: -2.9,-0.1 -3.2,-5 3.2,-5 2.6,5 0.1,5 0.1,-0.1 -2.5,-0.1
  silkscreen extent -1.5,-2.3 1.5,2.3
"LED T1-3/4 Flush" [mil]
  round 70 hole 45: 1(0,0) 2(100,0)
  silkscreen extent -65,-115 155,115
MHole250 [mil] "Mounting hole for .25\" screw"
  round 390 hole 390 unplated: 0(0,0)
  Keep-Out Layer circle w8: c0,0 r188
  silkscreen extent -188,-188 188,188
MHole#8 [mil] "Mounting Hole for #8 screw"
  round 169 hole 169 unplated: 0(0,0)
  Keep-Out Layer circle w8: c0,0 r150
  silkscreen extent -150,-150 150,150
PANASONIC_ELL [mm]
  rect 1.7x3.8 smd: 1(-2.85,0) 2(2.85,0)
  silkscreen extent -3,-3 3,3, body extent -3.25,-3.05 3.25,3.05, height 2.52
QFN-28 [mm] "QFN-28"
  rect 1.05x0.25 smd: 1(-2.479,1.5) 2(-2.479,1) 3(-2.479,0.5) 4(-2.479,0) 5(-2.479,-0.5) 6(-2.479,-1) 7(-2.479,-1.5) 15(2.479,-1.5) 16(2.479,-1) 17(2.479,-0.5) 18(2.479,0) 19(2.479,0.5) 20(2.479,1) 21(2.479,1.5)
  rect 0.25x1.05 smd: 8(-1.5,-2.479) 9(-1,-2.479) 10(-0.5,-2.479) 11(0,-2.479) 12(0.5,-2.479) 13(1,-2.479) 14(1.5,-2.479) 22(1.5,2.479) 23(1,2.479) 24(0.5,2.479) 25(0,2.479) 26(-0.5,2.479) 27(-1,2.479) 28(-1.5,2.479)
  rect 3x3 smd: 29(0,0)
  silkscreen extent -3.42,-2.5 2.5,2.5, body extent -2.5,-2.5 2.5,2.5, height 0.8
R0805#1 [mil]
  rect 50x55 smd: 1(-37,0) 2(37,0)
  silkscreen extent -75,-40 75,40
R0805#2 [mil] "0805 Generic"
  rect 35.43x49.21 smd: 1(-33.46,0) 2(33.46,0)
  silkscreen extent -8,-21 8,21, body extent -41,-25 39,25, height 24
R1206 [mil]
  rect 55x65 smd: 1(-55,0) 2(55,0)
  silkscreen extent -95,-45 95,45
SMA [mm] "DO-214-AC/SMA; 2 C-Bend Leads; Body 5 x 2.7 mm, inc. leads (LxW)"
  rect 2.4x1.8 smd: A(-2.05,0) C(2.05,0)
  silkscreen extent -3.65,-1.3 3.95,1.3, body extent -2.67,-1.43 2.53,1.17, height 2.4
SO8 [mm] "Small Outline; 8 Leads; Body Width 3.9 mm; Pitch 1.27 mm"
  rect 0.6x2.2 smd: 1(-1.905,-2.6) 2(-0.635,-2.6) 3(0.635,-2.6) 4(1.905,-2.6) 5(1.905,2.6) 6(0.635,2.6) 7(-0.635,2.6) 8(-1.905,2.6)
  silkscreen extent -2.88,-2.72 2.5,1.1
so16w [mm] "Small Outline; 16 Leads; Body Width 7.5 mm; Pitch 1.27 mm"
  rect 0.6x2.25 smd: 1(-4.445,-4.575) 2(-3.175,-4.575) 3(-1.905,-4.575) 4(-0.635,-4.575) 5(0.635,-4.575) 6(1.905,-4.575) 7(3.175,-4.575) 8(4.445,-4.575) 9(4.445,4.575) 10(3.175,4.575) 11(1.905,4.575) 12(0.635,4.575) 13(-0.635,4.575) 14(-1.905,4.575) 15(-3.175,4.575) 16(-4.445,4.575)
  silkscreen extent -5.42,-4.7 5.28,3.05
"SOIC 8" [mm]
  rect 0.6x2.05 smd: 1(-1.905,-2.675) 2(-0.635,-2.675) 3(0.635,-2.675) 4(1.905,-2.675) 5(1.905,2.675) 6(0.635,2.675) 7(-0.635,2.675) 8(-1.905,2.675)
  silkscreen extent -2.88,-2.8 2.5,1.25, body extent -2.49,-3.19 2.51,3.14, height 1.88
SOT23 [mm] "SOT-23; 3 Leads; Body 3.1 x 2.5 mm, inc. leads (LxW max), Alternate Lead Configuration"
  rect 0.9x0.95 smd: 1(-0.95,-1.175) 2(0.95,-1.175) 3(0,1.175)
  silkscreen extent -2.05,-1.3 1.3,1.18
SOT23-5 [mm] "SOT-23/SC-74A; 5 Leads; Body 3 x 3 mm, inc. leads (LxW max)"
  rect 0.55x1.45 smd: 1(-0.95,-1.075) 2(0,-1.075) 3(0.95,-1.075) 4(0.95,1.075) 5(-0.95,1.075)
  silkscreen extent -1.57,-1.35 1.55,0.9
SOT95P245X110-*L [mm] "SOT23, 8-Leads, Body 3.1x2.6mm (max), Pitch 0.95mm, IPC High Density"
  rect 0.9x0.3 smd: 1(-1.1,0.95) 2(-1.1,0.3) 3(-1.1,-0.35) 4(-1.1,-1) 5(1.1,-1) 6(1.1,-0.35) 7(1.1,0.3) 8(1.1,0.95)
  silkscreen extent -1.12,-1.65 0.4,1.9, body extent -1.45,-1.46 1.37,1.44, height 1.2
SOT95P245X145-3L [mm] "SOT23, 3-Leads, Body 3.1x2.6mm (max), Pitch 0.95mm, IPC High Density"
  rect 1.2x0.6 smd: 1(-0.9,0.95) 2(-0.9,-0.95) 3(0.9,0)
  silkscreen extent -1.02,-1.55 0.87,1.92, body extent -0.87,-1.55 0.87,1.55, height 1.45
SOT95P245X145-5L [mm] "SOT23, 5-Leads, Body 3.1x2.6mm (max), Pitch 0.95mm, IPC High Density"
  rect 0.85x0.6 smd: 1(-1.025,0.95) 2(-1.025,0) 3(-1.025,-0.95) 4(1.025,-0.95) 5(1.025,0.95)
  silkscreen extent -1.15,-1.55 0.2,1.92, body extent -0.87,-1.55 0.87,1.55, height 1.45
TO263\7 [mil]
  rect 36x85 smd: 1(-150,-328) 2(-100,-328) 3(-50,-328) 4(0,-328) 5(50,-328) 6(100,-328) 7(150,-328)
  rect 425x410 smd: 8(0,0)
  silkscreen extent -230,-225 230,225
TQFP-80 [mm]
  rect 1.6x0.3 smd: 1(-6.6,4.75) 2(-6.6,4.25) 3(-6.6,3.75) 4(-6.6,3.25) 5(-6.6,2.75) 6(-6.6,2.25) 7(-6.6,1.75) 8(-6.6,1.25) 9(-6.6,0.75) 10(-6.6,0.25) 11(-6.6,-0.25) 12(-6.6,-0.75) 13(-6.6,-1.25) 14(-6.6,-1.75) 15(-6.6,-2.25) 16(-6.6,-2.75) 17(-6.6,-3.25) 18(-6.6,-3.75) 19(-6.6,-4.25) 20(-6.6,-4.75) 41(6.6,-4.75) 42(6.6,-4.25) 43(6.6,-3.75) 44(6.6,-3.25) 45(6.6,-2.75) 46(6.6,-2.25) 47(6.6,-1.75) 48(6.6,-1.25) 49(6.6,-0.75) 50(6.6,-0.25) 51(6.6,0.25) 52(6.6,0.75) 53(6.6,1.25) 54(6.6,1.75) 55(6.6,2.25) 56(6.6,2.75) 57(6.6,3.25) 58(6.6,3.75) 59(6.6,4.25) 60(6.6,4.75)
  rect 0.3x1.6 smd: 21(-4.75,-6.6) 22(-4.25,-6.6) 23(-3.75,-6.6) 24(-3.25,-6.6) 25(-2.75,-6.6) 26(-2.25,-6.6) 27(-1.75,-6.6) 28(-1.25,-6.6) 29(-0.75,-6.6) 30(-0.25,-6.6) 31(0.25,-6.6) 32(0.75,-6.6) 33(1.25,-6.6) 34(1.75,-6.6) 35(2.25,-6.6) 36(2.75,-6.6) 37(3.25,-6.6) 38(3.75,-6.6) 39(4.25,-6.6) 40(4.75,-6.6) 61(4.75,6.6) 62(4.25,6.6) 63(3.75,6.6) 64(3.25,6.6) 65(2.75,6.6) 66(2.25,6.6) 67(1.75,6.6) 68(1.25,6.6) 69(0.75,6.6) 70(0.25,6.6) 71(-0.25,6.6) 72(-0.75,6.6) 73(-1.25,6.6) 74(-1.75,6.6) 75(-2.25,6.6) 76(-2.75,6.6) 77(-3.25,6.6) 78(-3.75,6.6) 79(-4.25,6.6) 80(-4.75,6.6)
  silkscreen extent -6.72,-5.4 5.4,5.57
TSOC6 [mil] "THIN SMALL OUTLINE C-LEAD"
  rect 50x25 smd: 1(0,0) 2(0,-50) 3(0,-100) 4(150,-100) 5(150,-50) 6(150,0)
  silkscreen extent 0,-125 150,25
TSSOP\10 [mm] "T Shrink Small Outline; 10 Leads; Body Width 3 mm; Pitch 0.5 mm"
  rect 0.3x1.6 smd: 1(-1,-2.05) 2(-0.5,-2.05) 3(0,-2.05) 4(0.5,-2.05) 5(1,-2.05) 6(1,2.05) 7(0.5,2.05) 8(0,2.05) 9(-0.5,2.05) 10(-1,2.05)
  silkscreen extent -1.83,-2.17 1.58,0.85
WIRE_125 [mil] "Hole for .125 AMP-IN"
  round 200 hole 125: 1(0,0)
  silkscreen extent -105,-105 105,105
XTSL\CSM-7 [mm] "Quartz Crystal, SM; 2 Leads; Body 11.4 x 4.8 x 5 mm (LxWxH)"
  rect 5.5x2 smd: 1(-4.75,0) 2(4.75,0)
  silkscreen extent -5.7,-2.4 5.7,2.4

## Part data
C1 C2 C3 C4 C8 C9 C10 C11 C13 C14 C19 C24 C25 C27 C28 C32 C33 C34 C35 C36 C37 C38 C41 C42 C47 C49 C50 C51 C52 C53 C54 C55: library part C
C5 C7: library part C#S/T491X476K035ATK, "CAPACITOR TANT 47UF 35V 10% SMD 7343-43 (EIA)"
C6: library part C#S/C0805C104K5RACK, "CAP .10UF 50V CERAMIC X7R 0805"
C12 C26: library part C#S/C0805C103K5RAC, "CAP 10000PF 50V CERAMIC X7R 0805"
C15 C17 C23 C29 C39 C40 C43 C44 C48: library part C, "CAP CER 1.0UF 16V 20% X7R 0805"
C16 C20: library part C#S/C0805C180J5GACTUK, "CAP CERAMIC 18PF 50V NP0 0805"
C18 C22 C30 C31: library part C#S/T495D686K016ATEK, "CAPACITOR TANT 68UF 16V 10% SMD"
C21: library part C#S/EEEFK1C100RP, "CAP ELECT 10UF 16V FK SMD"
D1: library part D#S/MURS360T3GM
D2 D7: library part D#S/8TQ080SPBFZ, "DIODE SCHOTTKY 80V 8A D2PAK"
D3 D4 D5: library part D#S/BAS167F0D, "Diodes Inc BAS16 75V 200mA"
D6: library part B350A-13-F
D8 D9: library part MURA110T3G
DS1 DS2 DS5 DS6 DS9 DS10 DS13 DS14 DS17 DS18 DS21 DS22 DS25 DS26 DS29 DS30 DS33 DS34 DS37 DS38 DS41 DS42 DS45 DS46: library part L#S/TLMK3210, "Vishay Red LED PLCC-3"
DS3 DS4 DS7 DS8 DS11 DS12 DS15 DS16 DS19 DS20 DS23 DS24 DS27 DS28 DS31 DS32 DS35 DS36 DS39 DS40 DS43 DS44 DS47 DS48: library part L#S/LM1PPG103N1Z, "120-degree, 3.3 x 3.5-mm, SMT LED in green color with water-transparent lens"
DS49: library part LRCOVLFR3C7Z, "LED 631NM TAPERED RED 5MM"
DS50: library part LGCOVLFG3C7Z, "LED 525NM ROUND GREEN 5MM"
J1 J2 J3 J4 J5 J6 J7 J8 J9 J10 J11 J12: library part ~125_WIRE
J13: library part 787834-2, "USB Connectors B TYPE VERT BLK SKT"
J14: library part JCPM5086VE0Z, "CONN HEADER VERT 6POS 5.08MM"
JP1 JP2 JP3 JP4: library part RS/ERJ6ENF, "RES 0.0 OHM 1/8W 5% 0805 SMD"
L1 L2: library part N#S/DO5022P333Z, "33uH 3A Surface Mount Inductor"
L3 L4: library part L_PANASONIC_ELL
M1 M2 M3 M4: library part MountingHole_1/4
M5 M6 M7 M8 M9 M10: library part MountingHole_8
Q1 Q2: library part Q#S/FDS8884F, "MOSFET N-CH 30V 8.5A 8-SOIC"
Q3: "MOSFET N-CH 25V 220MA SOT-23"
R1 R2 R3 R6 R10 R11 R14 R16 R19 R21 R23 R26 R27 R30 R34 R37: library part RS/ERJ6ENF, "RES 100K OHM 1/8W 1% 0805 SMD"
R4 R15 R20 R28 R32 R40 R112 R130: library part RS/ERJ6ENF, "RES 10.0K OHM 1/8W 1% 0805 SMD"
R5: library part RS/ERJ8ENF, "RES 121 OHM 1/4W 1% 1206 SMD"
R7 R17: library part RS/ERJ6ENF, "RES 1.00K OHM 1/8W 1% 0805 SMD"
R8 R22 R29: library part RS/ERJ6GEYJ, "RES 0.0 OHM 1/8W 5% 0805 SMD"
R9 R128: library part RS/ERJ6ENF, "RES 3.16K OHM 1/8W 1% 0805 SMD"
R12 R36: library part RS/ERJ6ENF, "RES 390 OHM 1/8W 5% 0805 SMD"
R13 R31 R33: library part RS/ERJ6ENF
R18: library part RS/ERJ6ENF, "RES 1.65K OHM 1/8W 1% 0805 SMD"
R24: library part RS/ERJ6ENF, "RES 7.50K OHM 1/8W 1% 0805 SMD"
R25: library part RS/ERJ6ENF, "RES 2.49K OHM 1/8W 1% 0805 SMD"
R35: library part RS/ERJ6ENF, "RES 4.7K OHM 1/8W 5% 0805 SMD"
R46 R47 R48 R49 R50 R51 R52 R53 R54 R55 R56 R57 R88 R89 R90 R91 R92 R93 R94 R95 R96 R97 R98 R99: library part RS/ERJ8ENF, "RES 15.0 OHM 1/4W 1% 1206 SMD"
R58 R59 R60 R61 R62 R63 R64 R65 R66 R67 R68 R69 R100 R101 R102 R103 R104 R105 R106 R107 R108 R109 R110 R111: library part RS/ERJ8ENF, "RES 32.4 OHM 1/4W 1% 1206 SMD"
R129: library part RS/ERJ6ENF, "RES 20.0K OHM 1/8W 1% 0805 SMD"
U1 U4 U8 U9: library part IS/M25P64VMF6GZ, "64 MBit Serial SPI NOR FLASH"
U2: library part IS/DSPIC30F501320IPTZ_1, "IC DSPIC MCU/DSP 144K 80TQFP"
U3: library part IS/SN65HVD230DRT, "IC 3.3V CAN TXRX W/STNDBY 8-SOIC"
U5: library part IS/CS4344CZZZ, "IC DAC 24BIT 192KHZ 10-TSSOP"
U6 U11: library part IS/LM2676SADJN, "IC REG SIMPLE SWITCHER TO-263-7"
U7: library part IS/LP2950CDT33N, "IC REG VOLT MICROPWR 3.3V TO-252"
U10: library part TPA3001D1
U12: library part I#S/MOCD207MZ, "OPTOCOUPLER TRANS-OUT 2CH 8-SOIC"
U13: library part I#S/SN74AHC1G125DBVT, "TI Tri State Buffer Single Gate"
U14: library part MAX5401
U15: library part OPA333
U16: library part CP2102
U17: library part DS2401P+
U18: library part OPA340
Y1: library part ZS/ECS1228205PTRZ, "CRYSTAL 8.192MHZ 18PF FUND SMD"

## Free pads (board coordinates)
  round 250 hole 250 unplated: 0(250,1960) 0(250,2260) 0(550,1660) 0(550,1960) 0(4550,150) 1(3580,5260) 1(4290,150) 2(3550,150) 3(2750,150)
  round 125 hole 125 unplated paste+0 mask+25: 0(270,3140)
  round 125 hole 125 unplated: 1(630,5350) 1(1420,2050) 1(1760,2500) 1(1800,5030) 1(1880,3830) 1(1910,3320) 1(1970,3460) 1(2000,3970) 1(2260,1350) 1(2370,4930) 1(2430,1310) 1(2590,1310) 1(2590,4170) 1(2750,1310) 1(2750,4170) 1(2910,1310) 1(2910,4170) 1(3080,1310) 1(3250,1420) 1(3250,4080) 1(3430,1500) 1(3590,1660) 1(3820,3890) 1(4170,2750) 1(4230,2390) 1(5080,2970)
  round 200 hole 169: 1(1190,5370)
  round 169 hole 169 unplated: 1(1710,1780) 1(1920,1600) 1(2080,1450) 1(3450,5060) 1(4250,4330) 1(4700,4010) 1(4700,4250) 1(5150,4360)
  round 150 hole 125 paste+0 mask+25: 2(90,4090)

## Via types
v1: diameter 24, hole 12, Top Layer to Bottom Layer, 374 vias
v2: diameter 25, hole 15, Top Layer to Bottom Layer, 64 vias
v3: diameter 31, hole 15, Top Layer to Bottom Layer, 15 vias
v4: diameter 28.03, hole 28, Top Layer to Bottom Layer, 4 vias
v5: diameter 33.86, hole 33.86, Top Layer to Bottom Layer, 1 vias

## Nets (pads, with @x,y where several pads share a name; then routed paths per layer and width w, separated by ;. In a path a pad name is that pad's centre, name@x,y a point inside that pad or via, vN(x,y) a via of type N, cw(c..) or ccw(c..) an arc to the next point about the centre after c; other vN are vias at no path point)
+5V_GREEN: C18.1 C22.1 DS3.2 DS4.2 DS7.2 DS8.2 DS11.2 DS12.2 DS15.2 DS16.2 DS19.2 DS20.2 DS23.2 DS24.2 DS27.2 DS28.2 DS31.2 DS32.2 DS35.2 DS36.2 DS39.2 DS40.2 DS43.2 DS44.2 DS47.2 DS48.2 L1.2 R9.2 | length 7341.1
  Top Layer w20: v1@3890,1621 v1(3891,1621)
  Top Layer w40: C18.1@120,4280 120,5275 197.5,5352.5 L1.2@355,5352.5 ; v1(532,4163) R9.2@585,4163
  Bottom Layer w10: v1(50,3550) 180,3680 180,4160 120,4220 v1(120,4395) ; 2200.23,4409.77 DS15.2@2200.23,4502.02
  Bottom Layer w20: DS28.2@878.15,2720.47 1049.53,2720.47 v1(1050,2720) ; DS23.2@932.7,3192.72 994.38,3192.72 1057.1,3130 v2(1440,3130) ; DS27.2@947.98,2250.23 1060.23,2250.23 v1(1100,2290) ; 1088,3611 1090.05,3608.95 1176.05,3608.95 v1(1379,3406) ; DS24.2@1107.27,3635.85 DS24.2@1124.15,3635.85 ; DS32.2@1136.79,1814 1194,1814 v1(1270,1890) ; DS19.2@1386.7,4021.54 1386.7,3983.3 v1(1480,3890) ; DS31.2@1432.46,1440.7 1440.7,1440.7 v1(1550,1550) ; DS20.2@1764,4313.21 1764,4236 v1(1830,4170) ; DS36.2@1815.15,1157.27 1815.15,1185.15 v1(1910,1280) ; 2200.23,4409.77 v1(2340,4270) ; DS35.2@2257.28,982.7 2320,1045.42 v1(2320,1130) ; v1(2670,4390) 2670.47,4390.47 DS16.2@2670.47,4571.85 ; DS40.2@2729.53,928.15 2729.53,1089.53 v1(2730,1090) ; v1(3080,4360) 3080,4454.58 DS11.2@3142.72,4517.3 ; v1(3170,1150) 3199.77,1120.23 DS39.2@3199.77,997.98 ; v1(3480,4220) 3585.85,4325.85 DS12.2@3585.85,4342.73 ; v1(3580,1340) 3637,1283 DS44.2@3637,1186.79 ; v1(3780,3990) 3850,3990 3919.3,4059.3 DS7.2@3967.54,4059.3 ; v1(3891,1621) 3966,1546 3991,1546 ; DS43.2@4009.3,1482.46 4009.3,1530.7 ; v1(4090,3070) 4269.77,3249.77 DS3.2@4452.02,3249.77 ; v1(4110,3630) 4167,3687 DS8.2@4263.21,3687 ; v1(4165.95,1960) 4260.81,1865.15 DS48.2@4292.73,1865.15 ; v1(4320,2360) 4367.28,2360 4420,2307.28 DS47.2@4467.3,2307.28 ; v1(4360,2780) 4360.47,2779.53 DS4.2@4521.85,2779.53
  other v1: 120,4650 120,4750 120,4850 120,4950 120,5050 120,5150
+5V_RED: C30.1 C31.1 DS1.2 DS2.2 DS5.2 DS6.2 DS9.2 DS10.2 DS13.2 DS14.2 DS17.2 DS18.2 DS21.2 DS22.2 DS25.2 DS26.2 DS29.2 DS30.2 DS33.2 DS34.2 DS37.2 DS38.2 DS41.2 DS42.2 DS45.2 DS46.2 L2.2 R18.2 | length 19132.8
  Top Layer w20: R18.2@363,2980 363,2947 375,2935 645,2935 690,2890 690,2690 720,2660 v1(1250,2660)
  Top Layer w75: v1(1230,2350) 1230,2156.95 1312.5,2074.45 1312.5,1994.36 2106.86,1200 2410,1200 2430,1180 3100,1180 3130,1210 3300,1210 3400,1310 v1(3850,1760) ; v1(1250,2660) 1370,2660 1380,2670 1380,3260 1510,3390 1510,3485 1565,3540 1565,3655 1650,3740 L2.2@1650,3887.5 ; v1(3980,1950) 4190,2160 ; v1(4190,2180) 4110,2260 4110,2440 4190,2520 v1(4190,2590) 4290,2690 4290,2790 v1(4220,2860)
  Top Layer w100: L2.2@1650,3887.5 1667.5,3887.5 1905,4125 2365,4125 2530,4290 2960,4290 3050,4200 3330,4200 v2(3565,3970) v1(3590,3970) ; v1(3740,3750) 3910,3750 4010,3650 4010,3380 4060,3330 v1(4060,3320)
  Bottom Layer w20: DS22.2@889.84,2958.79 1012.15,2958.79 1060.94,2910 1170,2910 1260,3000 v1(1380,3000) ; DS25.2@897.55,2482.66 1072.66,2482.66 v1(1250,2660) ; DS21.2@1005.8,3420.38 1047.52,3420.38 1167.9,3300 1230,3300 1300,3230 v1(1380,3230) ; DS26.2@1028.4,2025.06 1165.06,2025.06 v1(1230,2090) ; DS18.2@1236.19,3835.22 1236.19,3773.81 1400,3610 v1(1565,3610) ; DS29.2@1272.14,1617.93 1287.93,1617.93 v1(1490,1820) ; DS30.2@1614.78,1286.19 1614.78,1304.78 v1(1810,1500) ; v1(1740,3960) 1567.93,4132.07 ; DS14.2@1975.06,4421.6 1975.06,4244.94 2090,4130 v1(2160,4130) ; DS33.2@2029.62,1055.8 2110,1136.18 v1(2110,1210) ; DS13.2@2432.66,4552.45 2451.21,4533.91 2451.21,4358.79 v1(2530,4280) ; 2491.21,1051.21 DS34.2@2491.21,939.84 2491.21,1031.21 2560,1100 v1(2560,1180) ; v1(2890,4290) 2890,4541.37 DS10.2@2908.79,4560.16 ; DS37.2@2967.34,947.55 v1@2967.34,1177.34 ; v1(3250,4200) 3250,4290 3370.38,4410.38 DS9.2@3370.38,4444.2 ; v1(3367.81,1270.99) 3424.94,1213.86 DS38.2@3424.94,1078.4 3424.94,1205.06 ; v1(3500,4040) 3560,4100 3650,4100 3763.81,4213.81 DS6.2@3785.22,4213.81 ; v1(3650,1560) 3832.07,1377.93 DS41.2@3832.07,1322.14 ; v1(3930,3740) 4072.07,3882.07 DS5.2@4127.86,3882.07 ; 3942.45,1772.45 4029.91,1772.45 4137.58,1664.78 DS42.2@4163.81,1664.78 ; v1(4060,3320) 4060,3360 4174.94,3474.94 DS2.2@4371.6,3474.94 ; v1(4190,2180) 4252.1,2180 4352.48,2079.62 DS45.2@4394.2,2079.62 ; v1(4190,2590) 4360,2590 4408.79,2541.21 DS46.2@4510.16,2541.21 ; v1(4220,2860) 4220,2930 4307.34,3017.34 DS1.2@4502.45,3017.34 ; 1567.93,4132.07 DS17.2@1567.93,4177.86 1567.93,4132.07
  Bottom Layer w75: v2@1230,2320 v1(1230,2350) 1310,2420 v1(1310,2660) ; v1(3850,1760) 3930,1760 3980,1810 v1(3980,1950)
  Bottom Layer w100: v1(3590,3970) 3590,3920 3740,3770 v1(3740,3750)
  other v1: 2970,1180
  other v2: 3850,1735 3825,1760 3875,1760 3850,1785 3980,1925 3955,1950 4005,1950 3980,1975 1230,2310 1210,2330 1250,2330 1310,2635 1285,2660 1335,2660 1310,2685 3740,3720 3710,3750 3770,3750 3740,3780 3590,3945 3615,3970 3590,3995
GND: C1.1 C2.1 C3.1 C4.1 C5.2 C6.2 C7.2 C8.2 C9.2 C10.1 C11.1 C13.2 C14.1 C15.1 C16.2 C17.1 C18.2 C19.1 C20.2 C21.2 C22.2 C23.1 C24.1 C25.1 C28.1 C29.2 C30.2 C31.2 C32.1 C33.2 C34.2 C35.2 C36.1 C37.1 C39.2 C42.2 C43.1 C44.1 C47.1 C49.2 C50.1 C51.1 C52.1 C53.1 C54.1 C55.1 D2.3 D3.1 D4.1 D5.1 D7.3 D8.A D9.A DS49.2 DS50.2 J1.1 J5.1 J12.1 J13.4 J14.3 JP1.2 JP2.2 JP3.2 JP4.2 pad.2@90,4090 Q1.1 Q1.2 Q1.3 Q2.1 Q2.2 Q2.3 Q3.2 R7.1 R17.1 R25.1 R32.1 R33.1 R34.1 R37.1 U1.10 U2.11 U2.26 U2.31 U2.51 U2.70 U2.79 U3.2 U4.10 U5.8 U6.4 U6.8 U7.2 U8.10 U9.10 U10.6 U10.12 U10.13 U10.18 U10.19 U10.PP1 U11.4 U11.8 U12.7 U13.3 U14.2 U15.2 U16.3 U16.29 U17.1 U18.2 | length 13481.8
  Top Layer w10: C3.1@527.56,3350 v1(557.56,3380) ; v1@651,4647 v1(652,4647) ; C49.2@2667.56,5010 2681,4996.56 v1(2681,4976) 2687,4970 U18.2@2739.65,4970 ; v1(2692,4846) 2692,4807 2712.46,4786.54 R32.1@2820,4786.54 ; v1(2696,5248) 2698,5250 C14.1@2734.88,5250 ; v1(2724,5436) 2728,5440 C6.2@2773,5440 ; v1(2735,5156) 2741,5150 C19.1@2774.88,5150 ; v1(2747,5082) 2759,5070 C32.1@2762.44,5070 ; v1(2764,5360) C33.2@2802.44,5360 ; v1(2896,4937) 2896,4928 2924,4900 U15.2@2959.65,4900 ; v1(2905,5318) 2950,5318 2960,5308 U5.8@2960,5255.29 ; v1(2970,5089) 2980,5099 C34.2@2980,5112.44 ; v1(3172,4807) 3172,4810.62 3178.19,4816.81 U14.2@3178.19,4856.69 ; R37.1@3193.46,5050 3240,5050 v1(3241,5051) ; R34.1@3680,966.54 3760.63,966.54 Q3.2@3764.57,962.6 3764.57,939.57 v1(3740,915) ; v1(4131,4560) 4140,4569 U17.1@4140,4600 ; U3.2@4170.31,5050 4230,5050 4242,5038 4290,5038 ; 4290,5043 v1(4290,4990) 4307,4973 C16.2@4400,4973 ; v1(4320,5091) 4337.56,5108.56 C4.1@4337.56,5120 ; C2.1@4340,4624.88 4340,4605 v1(4341,4604) ; v1(4490,4490) 4497.32,4482.68 U2.79@4540.16,4482.68 ; U2.70@4540.16,4659.84 4590.16,4659.84 v1(4600,4650) ; U2.51@4790.16,4909.84 4790.16,4849.84 v1(4800,4840) ; U2.11@4809.84,4390.16 4809.84,4469.84 v1(4840,4500) ; D3.1@4826.26,142.6 4857.4,142.6 v1(4870,130) ; D4.1@4826.26,332.6 4857.4,332.6 v1(4870,320) C55.1@4912.44,320 ; D5.1@4826.26,522.6 4857.4,522.6 v1(4870,510) ; U8.10@4999.88,995 5175,995 5213,957 5213,590 v1(5160,590) 5000,590 4980,570 4980,440 5000.32,419.69 U16.3@5049.45,419.69 ; U9.10@4999.88,1685 5115,1685 5125,1675 5125,1345 5123,1343 v1(5123,1233) ; U4.10@4999.88,2425 v1(5143,2425) v1@5145,2425 ; v1(5010.16,4659.84) U2.31@5059.84,4659.84 ; U16.3@5052.4,419.68 5130.31,419.68 v5(5150,400) ; U2.26@5059.84,4561.42 5112.42,4561.42 v1(5126,4575) ; v1(5159,4622) 5159.44,4622.44 C52.1@5170,4622.44 ; C47.1@5227.56,4560 5256,4560 ; 5257,4561 5256,4560 ; v1(5271,4577) 5256,4562 5256,4560 ; C20.2@5377,5060 v1(5430,5060)
  Top Layer w12: v1(4032,1113) 4032.29,1113 D8.A@4099.29,1180 ; C15.1@4240,646.54 v1@4283.54,646.54 ; U10.19@4279.76,927.2 4377.2,927.2 v3(4390,940) ; U10.18@4279.76,952.8 4377.2,952.8 v3(4390,940) ; U10.13@4279.76,1080.75 4364.25,1080.75 4390,1055 ; v1(4284,647) v1@4283.54,646.54 ; C24.1@4340,614.88 4315.19,614.88 v1@4283.54,646.54 ; U10.6@4500.24,927.2 4402.8,927.2 v3(4390,940) ; U10.12@4500.24,1080.75 4415.75,1080.75 4390,1055 ; C39.2@4703.46,740 4742,740 4743,741 v1(4744,741) ; v3(4390,940) 4390,1055
  Top Layer w20: C13.2@1942.44,4960 1942.44,4940.56 v1(1943,4940) ; U7.2@2080,5221 R25.1@2080,4947 2190,4947 2190,4945 v1(2200,4935) 2237.44,4935 C50.1@2250,4947.56 ; U12.7@3275.32,4585 3215,4585 3200,4600 3200,4680 3270,4750 v1(3380,4750) ; U13.3@3337.4,5197.68 3337.4,5132.6 v1(3340,5130) ; v1(4054,930) R33.1@4106.54,930 C43.1@4106.54,800 ; JP3.2@4057,4200 4057,4100 v1(4330,4100) ; JP2.2@4057,4300 JP1.2@4057,4400 v1(4110,4400) ; C35.2@4293.46,1670 4362,1670 ; v1(4362,1356) 4363,1355 v1(4363,1317) ; v1(4362,1403) 4362,1670 ; v1@4363,1273 v1(4364,1273) ; C36.1@4426.54,1670 4362,1670 ; D9.A@4630.71,1180 4702,1180 v1(4707,1185) ; U1.10@4999.88,3495 5135,3495 v1(5140,3490)
  Top Layer w35: R17.1@363,3070 363,3123 370,3130 U11.8@810,3130 ; v2(1410,3680) D7.3@1410,3800 ; v2(1440,3680) D7.3@1440,3800
  Top Layer w40: C5.2@140,3660 140,3950 370,4180 C22.2@370,4495 225,4640 v1(225,4850) v1(285,4910) v1(435,4910) v1(495,4850) ; v1(322.69,4132.69) 380.39,4075 698,4075 ; v1@373,4407 R7.1@585,4407 ; R7.1@588,4410 U6.4@732,4410 ; v1(1820,5380) 1888,5380 ; 1890,5382 2082,5382 2095,5395 v1(2385,5395)
  Top Layer w100: 2060,4290 v1(2260,4290) C31.2@2260,4375 C30.2@2060,4375 2060,4290
  Top Layer w150: J5.1@2602.03,3589.17 cw(c2750,2750) J1.1@2897.97,3589.17
  Bottom Layer w10: C1.1@650,4567.56 650,4645 v1(652,4647) ; C54.1@4540.16,4592.91 4542.91,4592.91 v1(4600,4650) ; v1(4800,4840) 4812.44,4827.56 C53.1@4812.44,4800 ; v1(4840,4500) 4867.56,4527.56 C51.1@4880,4527.56 ; v1@5141,2423 v1(5143,2425) ; v1(5170,1457) 5192.44,1434.56 C9.2@5192.44,1430 ; v1(5175,3346) 5210,3311 C11.1@5210,3307.56 ; v1(5247,839) 5250,836 C8.2@5250,797.56 ; C10.1@5250,2227.56 5250,2260 v1(5256,2266)
  Bottom Layer w12: C44.1@4220,706.54 4279.54,647 v1(4284,647) ; v3(4390,940) 4410,920 C29.2@4516.54,920 ; C17.1@4643.46,1080 4643.46,1041.65 C25.1@4685.12,1000 4685.12,935.88 4739,882 v1(4809,882)
  Bottom Layer w20: v1(4019,1036) 4055,1000 C28.1@4104.88,1000 4077,1000 4054,977 v1(4054,930) 4064,920 C23.1@4146.54,920 ; v1(4362,1356) v1(4362,1403) ; v1(4363,1317) 4363,1274 v1(4364,1273)
  Bottom Layer w150: J5.1@2602.03,3589.17 cw(c2750,2750) J1.1@2897.97,3589.17
  other v1: 1440,3740 80,3780 210,4020 440,4075 510,4075 585,4075 265.65,4075.65 2060,4260 370,4405
  other v2: 1080,2870 1120,2870 1160,2870 1200,2890 4790,2930 4790,2960 4790,2990 1200,3000 4790,3020 1200,3040 4790,3050 1200,3180 4790,3270 4790,3300 1200,3330 4790,3330 4790,3360 4790,3390 4790,3420 1410,3710 1440,3710 1410,3740 2090,4260 2120,4260 2220,4290 1300,4330 1300,4360 1300,4390 1300,4420 1300,4450 1300,4480 1300,4510 1300,4540 1300,4570 1300,4600
  other v3: 4341,851 4390,851 4439,851 4340,893 4390,893 4439,893 4341,941 4440,941 4389,987 4342,988 4440,988 4341,1029 4439,1029 4390,1030
  other v4: 5114,363 5187,363 5116,434 5184,434
NetC1_2: C1.2 C3.2 C5.1 C7.1 C13.1 D1.K R24.2 U6.2 U7.1 U11.2 U12.1 U12.4 | length 5058.6
  Top Layer w20: 1890,4730 2920,4730 3015,4635 U12.1@3064.69,4635 3115,4635 3140,4610 3140,4510 3115,4485 U12.4@3064.69,4485 ; R24.2@1893,4870 1893,4951
  Top Layer w35: 450,3350 450,3282.6 502.6,3230 U11.2@612,3230
  Top Layer w40: C5.1@390.98,3660 390.98,3895 645,3895 772,4022 772,4132 810,4170 810,4510 ; v1(648,4513) 651,4510 U6.2@732,4510 810,4510 ; 1890,5050.16 1890,4730 1890,4690 1750,4550 1470,4550 1350,4670 810,4670 810,4510 ; 1890,5055 1894.84,5050.16 U7.1@1990.04,5050.16 1997.56,5042.64 C13.1@1997.56,4960
  Bottom Layer w40: v1(648,4513) 649.44,4513 C1.2@650,4512.44
NetC6_1: C6.1 C33.1 U5.5 | length 112.3
  Top Layer w10: C33.1@2857.56,5360 2870.29,5372.73 2870.29,5416.71 U5.5@2920.63,5416.71
NetC12_1: C12.1 U6.3 | length 164.8
  Top Layer w10: C12.1@585,4503 628,4460 U6.3@732,4460
NetC12_2: C12.2 D2.2 L1.1 pad.1@1190,5370 U6.1 | length 1060.4
  Top Layer w40: L1.1@355,4747.5 1002.5,4747.5 1010,4755 D2.2@927,4755 ; C12.2@585,4577 U6.1@729,4577 ; U6.1@730,4570 732,4572 732,4744.5
NetC14_2: C14.2 U5.6 | length 77.7
  Top Layer w10: C14.2@2845.12,5250 2850.41,5255.29 U5.6@2920.63,5255.29
NetC16_1: C16.1 R8.2 Y1.2 | length 410.8
  Top Layer w10: C16.1@4400,5047 R8.2@4500,5047 4717,5047 4742.99,5072.99 Y1.2@4742.99,5130
NetC20_1: C20.1 U2.49 Y1.1 | length 644.4
  Top Layer w10: U2.49@4829.53,4909.84 4829.53,4959.53 5000,5130 5270,5130 5303,5097 C20.1@5303,5060
NetC26_1: C26.1 U11.3 | length 341.4
  Top Layer w15: v1(330,3200) 332.6,3202.6 C26.1@380,3202.6 ; v1(550,3180) U11.3@612,3180
  Bottom Layer w15: v1(330,3200) 530,3200 v1(550,3180)
NetC26_2: C26.2 D7.2 L2.1 U11.1 | length 1755.6
  Top Layer w15: v1(330,3280) 377.4,3280 C26.2@380,3277.4 ; v1(520,3300) 540,3280 U11.1@612,3280
  Top Layer w35: U11.1@612,3280 612,3372 730,3490 730,3630 760,3660 960,3660 970,3650 D7.2@973.46,3650
  Top Layer w150: 1190,4050 1470,4050 1650,4230 L2.1@1650,4442.5
  Bottom Layer w15: v1(330,3280) 350,3300 v1(520,3300)
NetC27_1: C27.1 U14.8 U18.1 U18.4 | length 587.8
  Top Layer w10: C27.1@2687.56,5080 2708.05,5059.51 2708.05,5039 U18.1@2739.65,5007.4 2768.6,5007.4 2775,5001 2775,4965 2807.4,4932.6 U18.4@2820.35,4932.6 2860.26,4972.5 3123.41,4972.5 U14.8@3152.6,4943.31
NetC27_2: C27.2 C49.1 R12.2 R36.1 | length 265.3
  Top Layer w10: R12.2@2550,5066.54 2618.98,5066.54 C27.2@2632.44,5080 2632.44,5030 C49.1@2612.44,5010 2566.54,4964.09 R36.1@2566.54,4930
NetC29_1: C29.1 U10.7 | length 93.1
  Top Layer w10: U10.7@4500.24,952.8 4547.2,952.8 v1(4578,922)
  Bottom Layer w10: C29.1@4576.54,920 4578,921.46 v1(4578,922)
NetC35_1: C35.1 J9.1 L3.2 | length 1245.5
  Top Layer w10: v1(3559,1877) 3834,1877 4041,1670 C35.1@4226.54,1670 4230,1666.54 L3.2@4230,1562.2
  Bottom Layer w10: J9.1@3420,2202.37 3420,2185 3559,2046 v1(3559,1877)
NetC36_2: C36.2 J10.1 L4.2 | length 1567.9
  Top Layer w10: v1(3671,2010) 3670,2009 3677,2002 3842,2002 3966,1878 4285.46,1878 C36.2@4493.46,1670 4490,1666.54 L4.2@4490,1562.2
  Bottom Layer w10: J10.1@3565,2459.42 3565,2444 3671,2338 v1(3671,2010)
NetC37_2: C37.2 R15.1 R32.2 U15.3 | length 210
  Top Layer w10: C37.2@2760,4837.56 2804.09,4837.56 R32.2@2820,4853.46 R15.1@2890,4853.46 2950.51,4853.46 U15.3@2959.65,4862.6
NetC38_1: C38.1 R13.1 | length 60
  Top Layer w10: R13.1@4076.54,1010 C38.1@4076.54,1070
NetC38_2: C38.2 D8.C L3.1 U10.14 U10.15 | length 490.7
  Top Layer w8: C38.2@4143.46,1070 4198,1070 4212.84,1055.16 4223,1055.16 U10.14@4279.76,1055.16 U10.15@4279.76,1029.57 ; D8.C@4249,1180 D8.C@4260.71,1180
  Top Layer w10: 4223,1055.16 4223,1142.29 D8.C@4260.71,1180 4260.71,1307.09 L3.1@4230,1337.8
NetC39_1: C39.1 U10.1 | length 160.8
  Top Layer w10: U10.1@4500.24,799.25 4551.75,799.25 4611,740 C39.1@4636.54,740
NetC40_1: C40.1 U10.2 | length 147.4
  Top Layer w10: U10.2@4500.24,824.84 4577.16,824.84 4603,799 4635.54,799 C40.1@4636.54,800
NetC40_2: C40.2 U14.7 | length 5495.7
  Top Layer w10: U14.7@3178.19,4943.31 3178.19,4927.6 3203.79,4902 3291,4902 3328,4865 v1(3334,4865) ; v1(4187,4478) 4196,4487 4222,4487 4233.5,4475.5 4288.5,4475.5 4386,4378 4386,4255.35 4482,4159.35 4482,4087 v1(4470,4075) ; C40.2@4703.46,800 4836,800 v1(4862,774)
  Bottom Layer w10: v1(3334,4865) 3336.5,4862.5 3391.5,4862.5 3428,4826 3470,4826 3542,4754 ; 3541,4754 3542,4754 ; v1(4187,4478) 3953,4478 3847.89,4583.11 3742.96,4583.11 3572.07,4754 3542,4754 ; v1(4470,4075) 4470,4063 4860.19,3672.81 4860.19,2644.55 4927.5,2577.25 4927.5,840.5 4861,774 v1(4862,774)
NetC41_1: C41.1 R31.1 | length 70
  Top Layer w8: R31.1@4703.46,980 C41.1@4703.46,1050
NetC41_2: C41.2 D9.C L4.1 U10.10 U10.11 | length 536.8
  Top Layer w8: D9.C@4469.29,1180 4490,1180 4552,1118 4552,1057.16 4554,1055.16 ; L4.1@4469.29,1317.09 L4.1@4490,1337.8 ; U10.10@4500.24,1029.57 U10.11@4500.24,1055.16 4554,1055.16 ; C41.2@4636.54,1050 4631.38,1055.16 4554,1055.16
  Top Layer w10: D9.C@4469.29,1179 4468,1179 4467,1180 4467,1314.8 L4.1@4490,1337.8 ; D9.C@4507,1180 D9.C@4508,1179
NetC42_1: C42.1 U10.21 | length 118.8
  Top Layer w10: C42.1@4167.56,860 4183.58,876.02 U10.21@4279.76,876.02
NetC43_2: C43.2 U10.22 | length 127.2
  Top Layer w10: C43.2@4173.46,800 4223.9,850.43 U10.22@4279.76,850.43